# Altium PCB New_LXe_twr.PcbDoc (part 1 of 5)
Units mm, origin at the board's own origin, x right, y up, seen from the top; angles counter-clockwise.
Board outline 130 x 150 mm, 6 copper layers (Top Layer, Internal Plane 1, MidLayer1, MidLayer2, Internal Plane 2, Bottom Layer); 673 components, 504 nets, 5569 pads, 803 vias.
Unrouted connection lines stored in the file: 633.
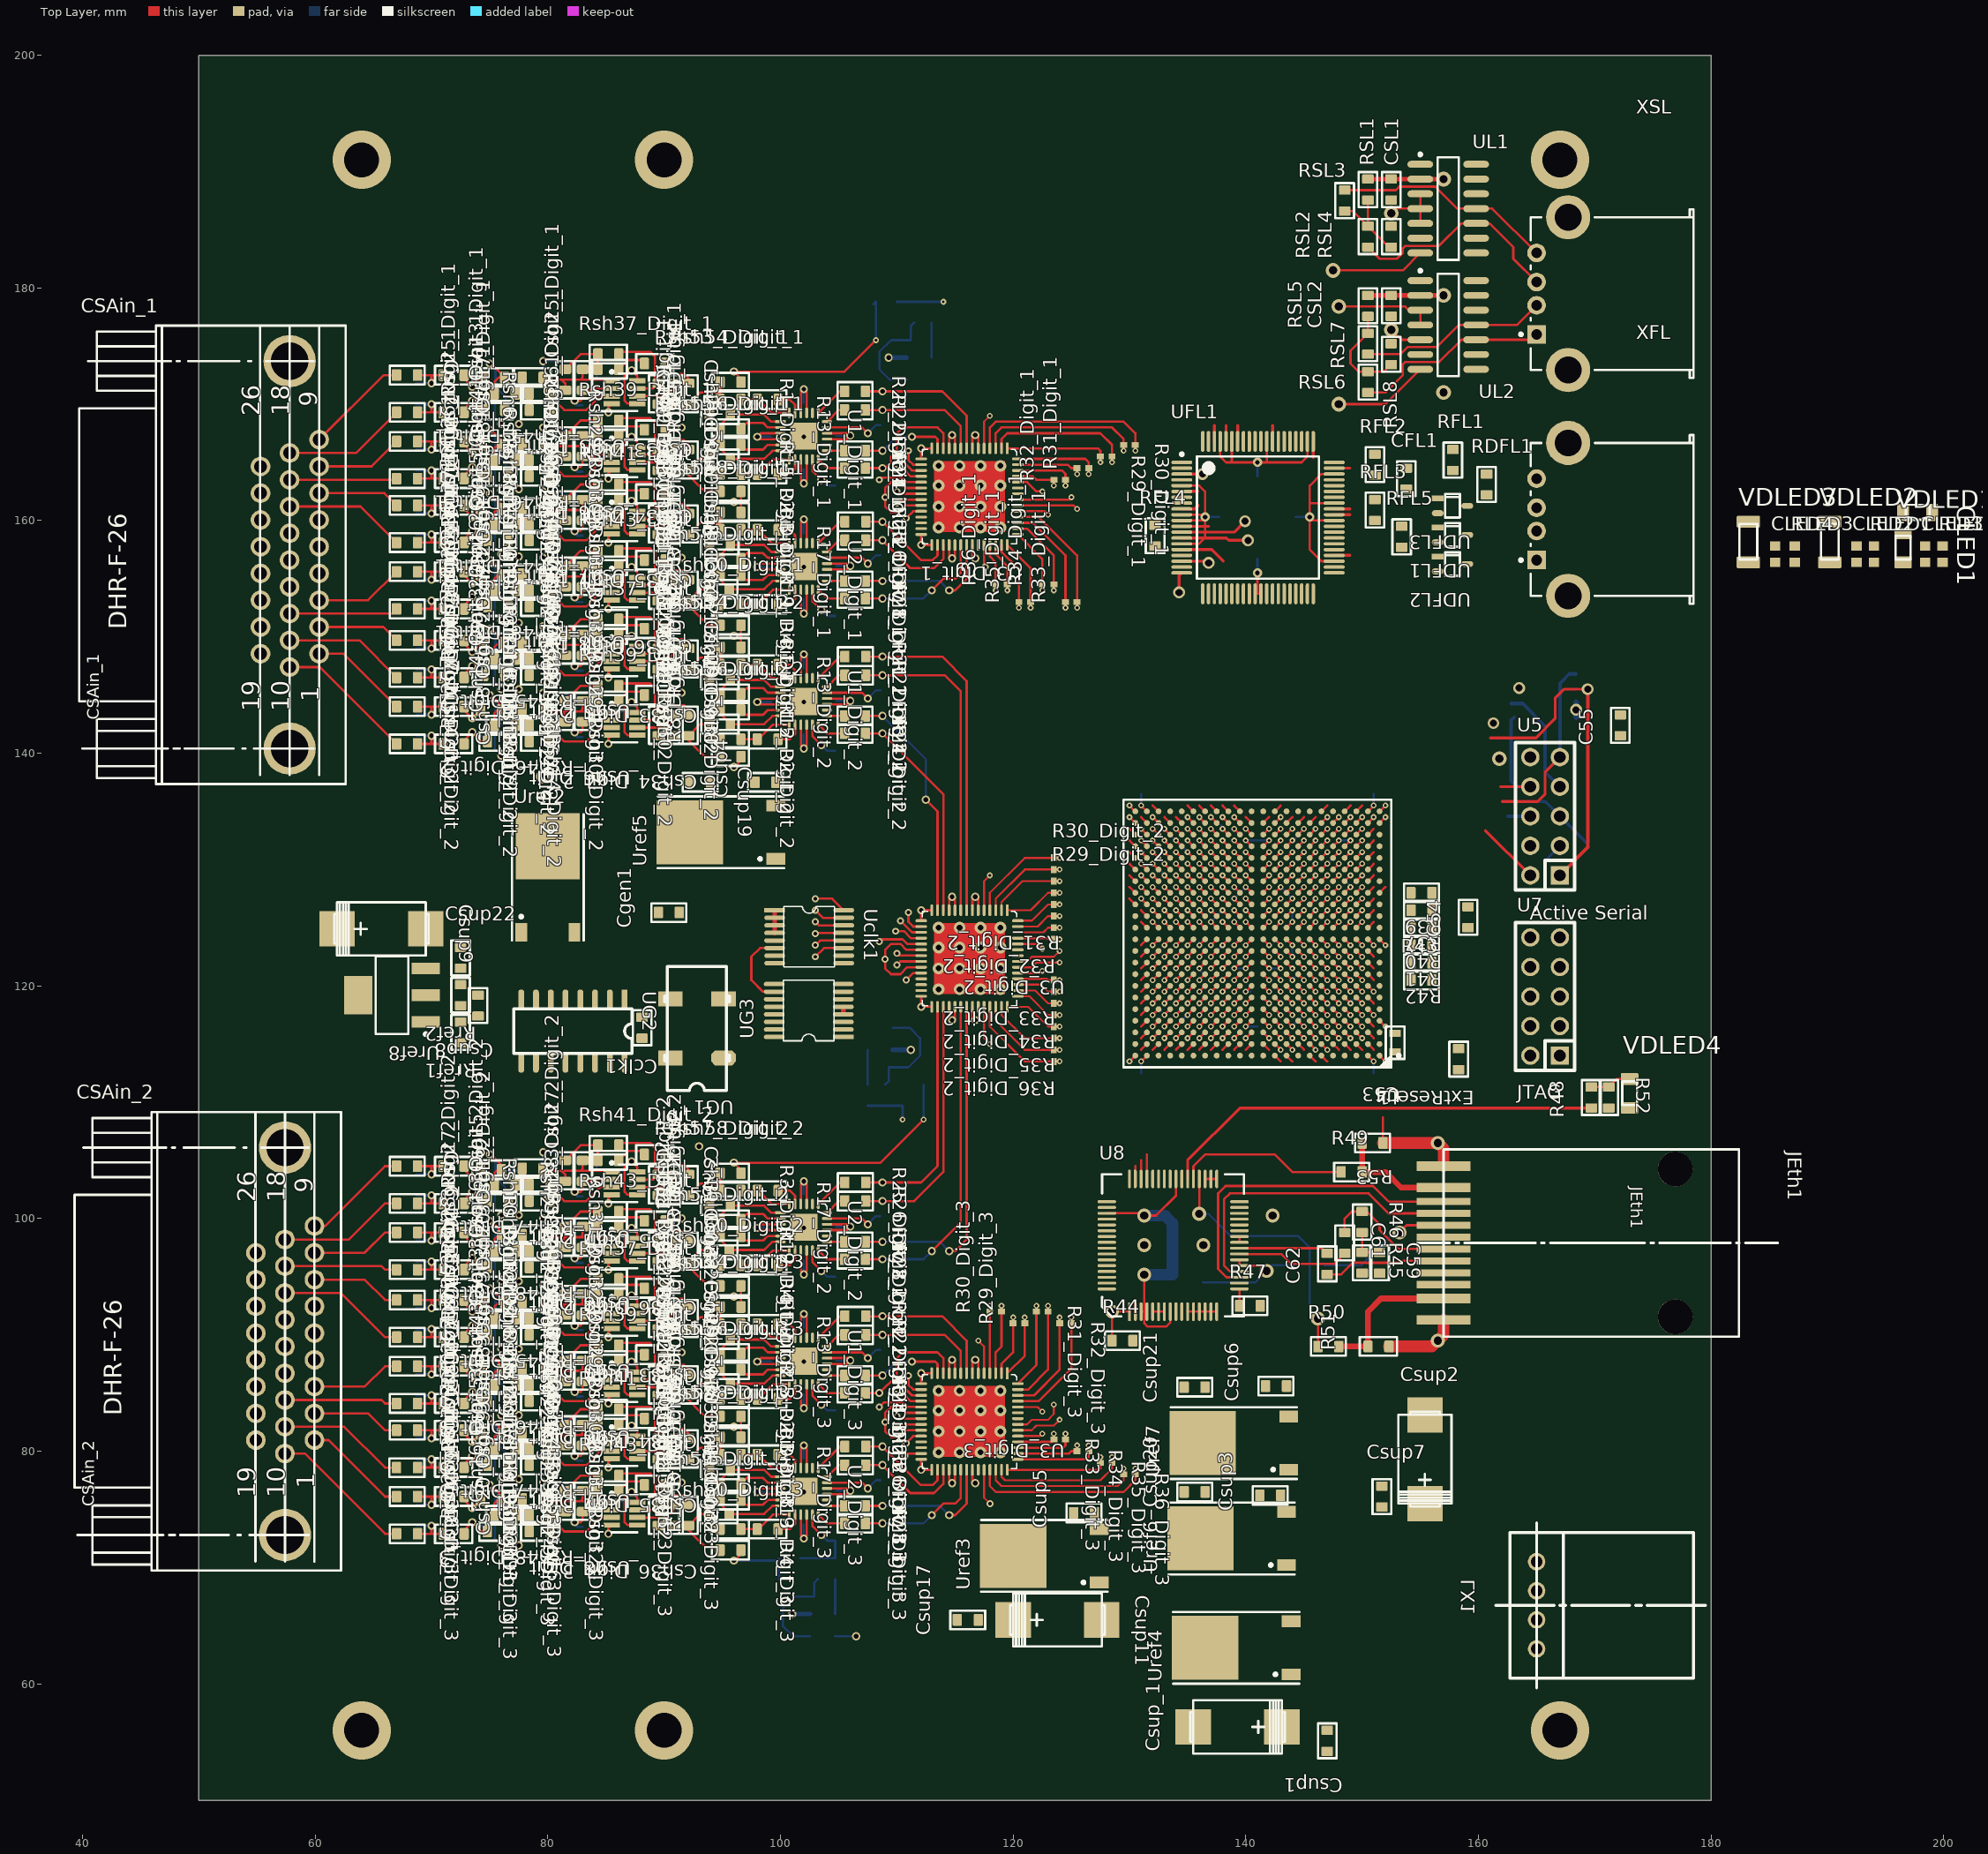
[diagram p0: Top Layer view]
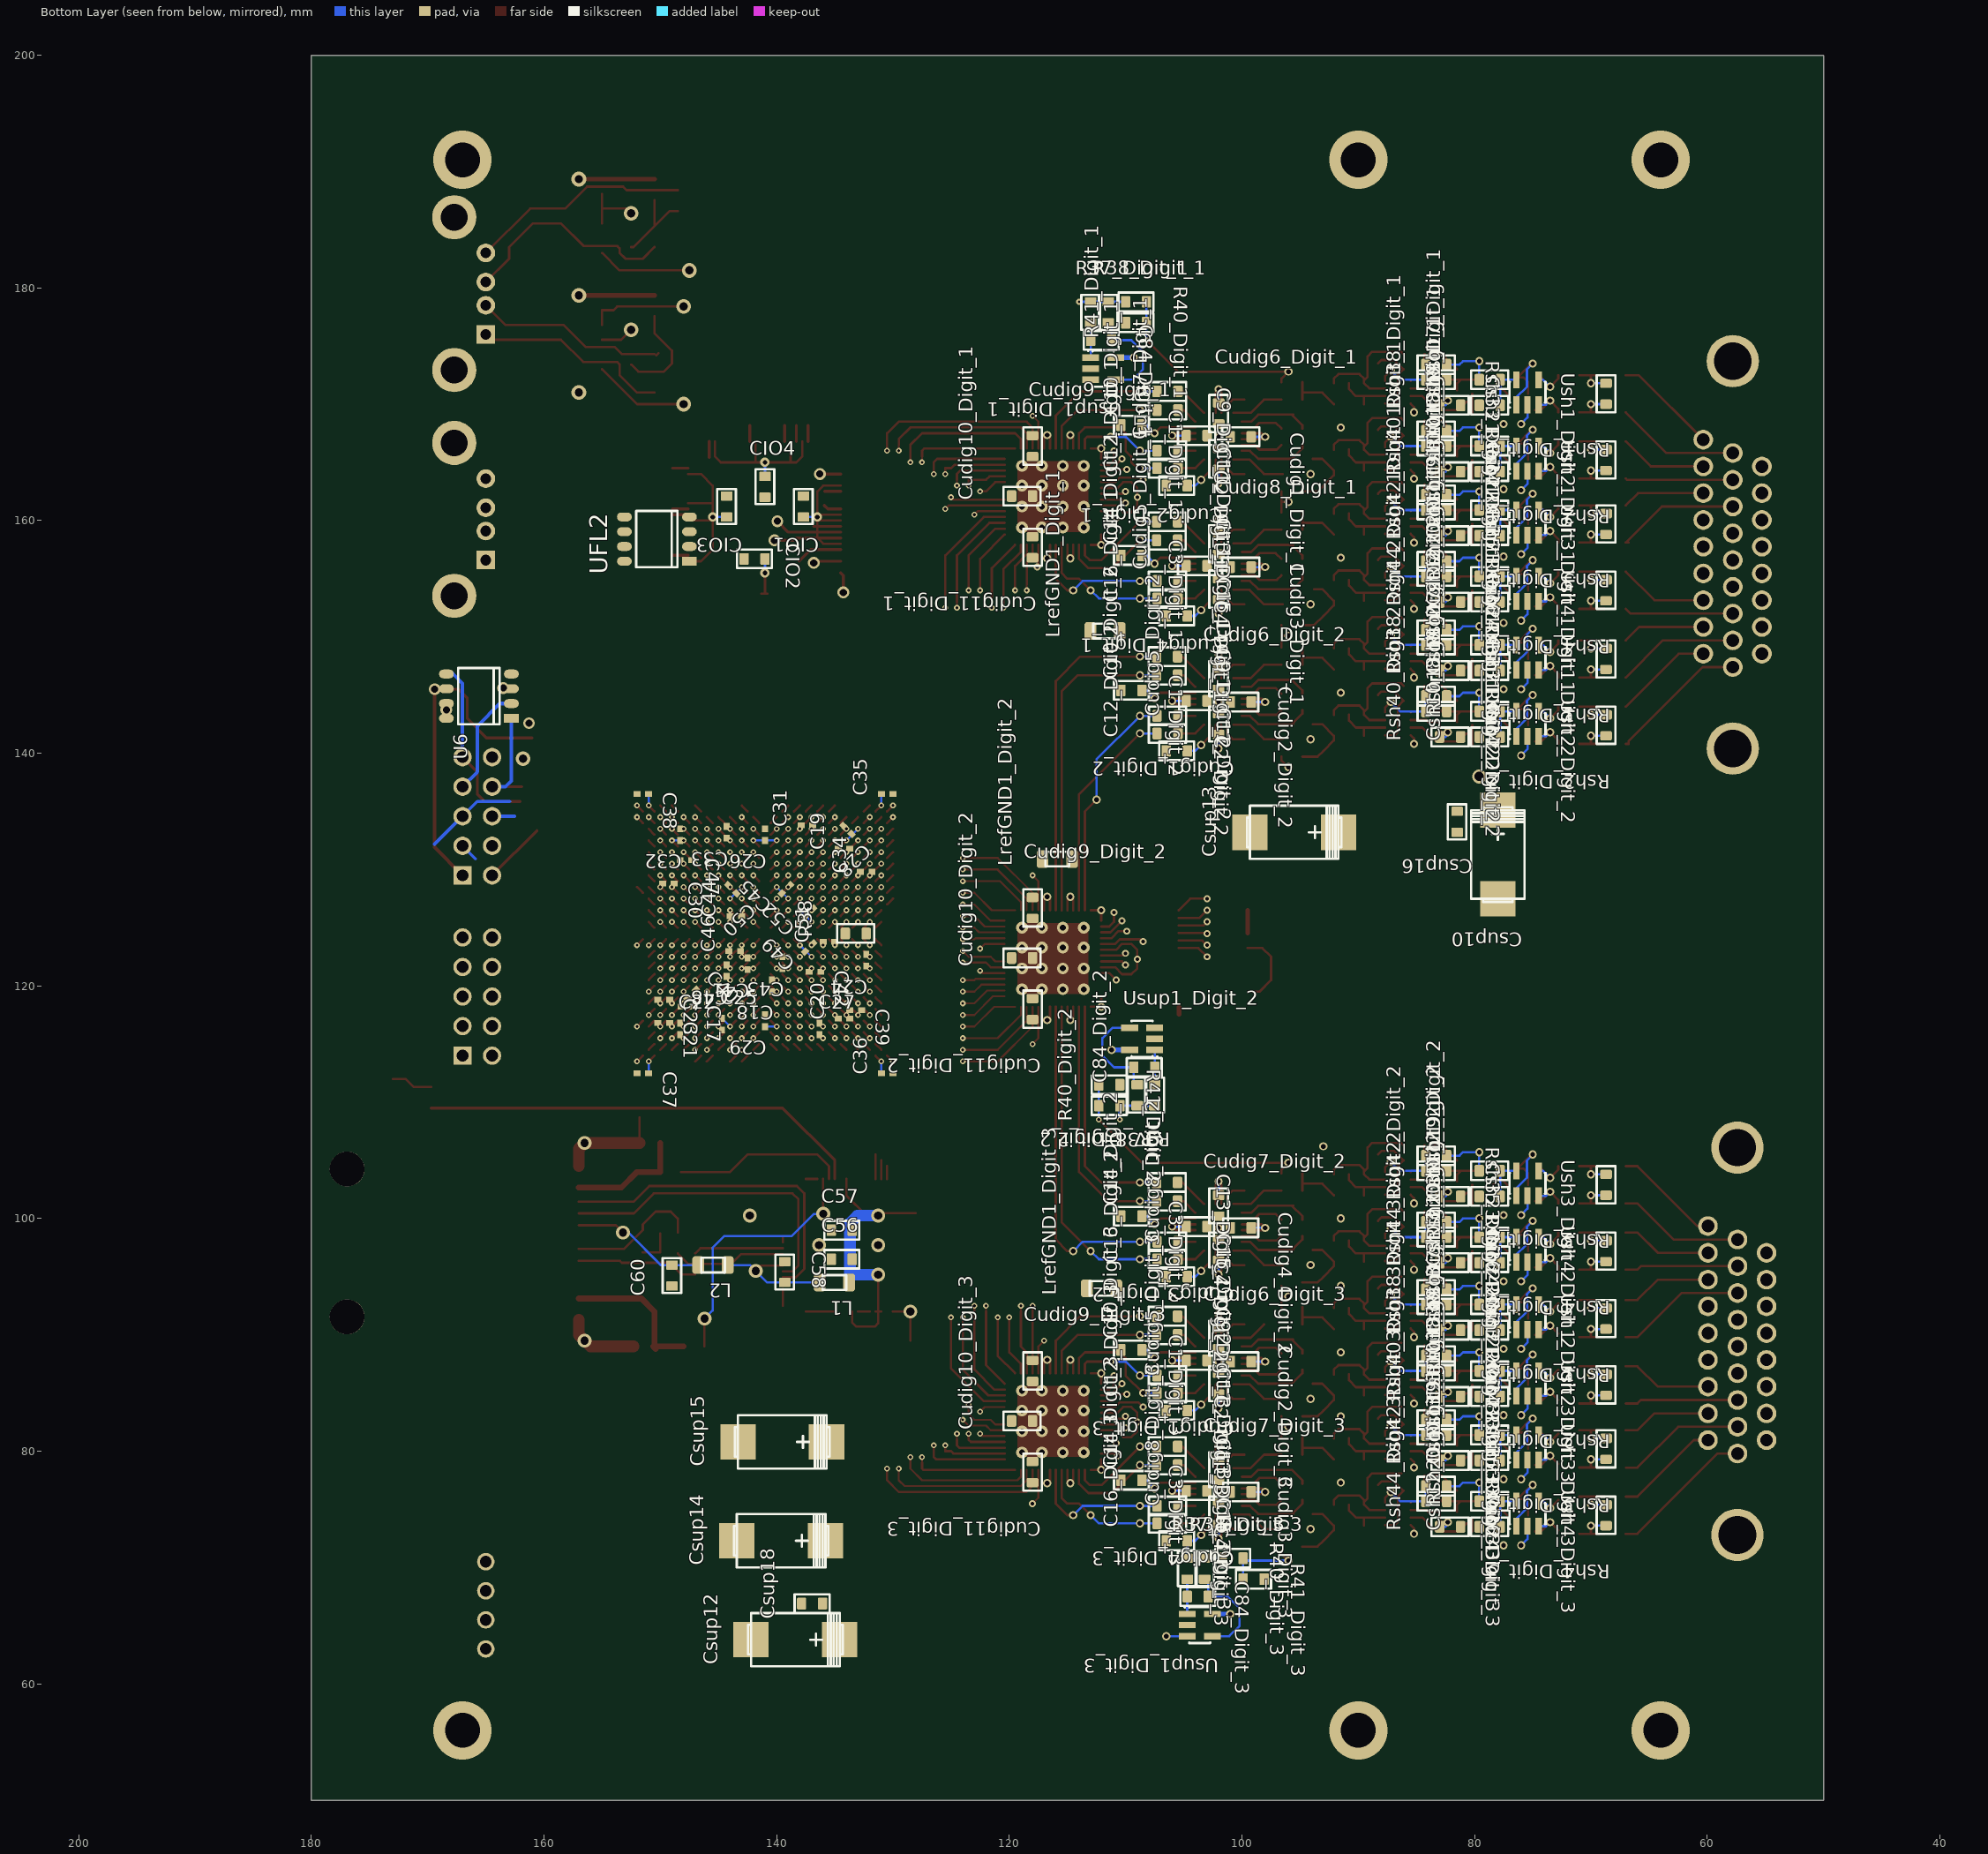
[diagram p1: Bottom Layer view, seen from below]
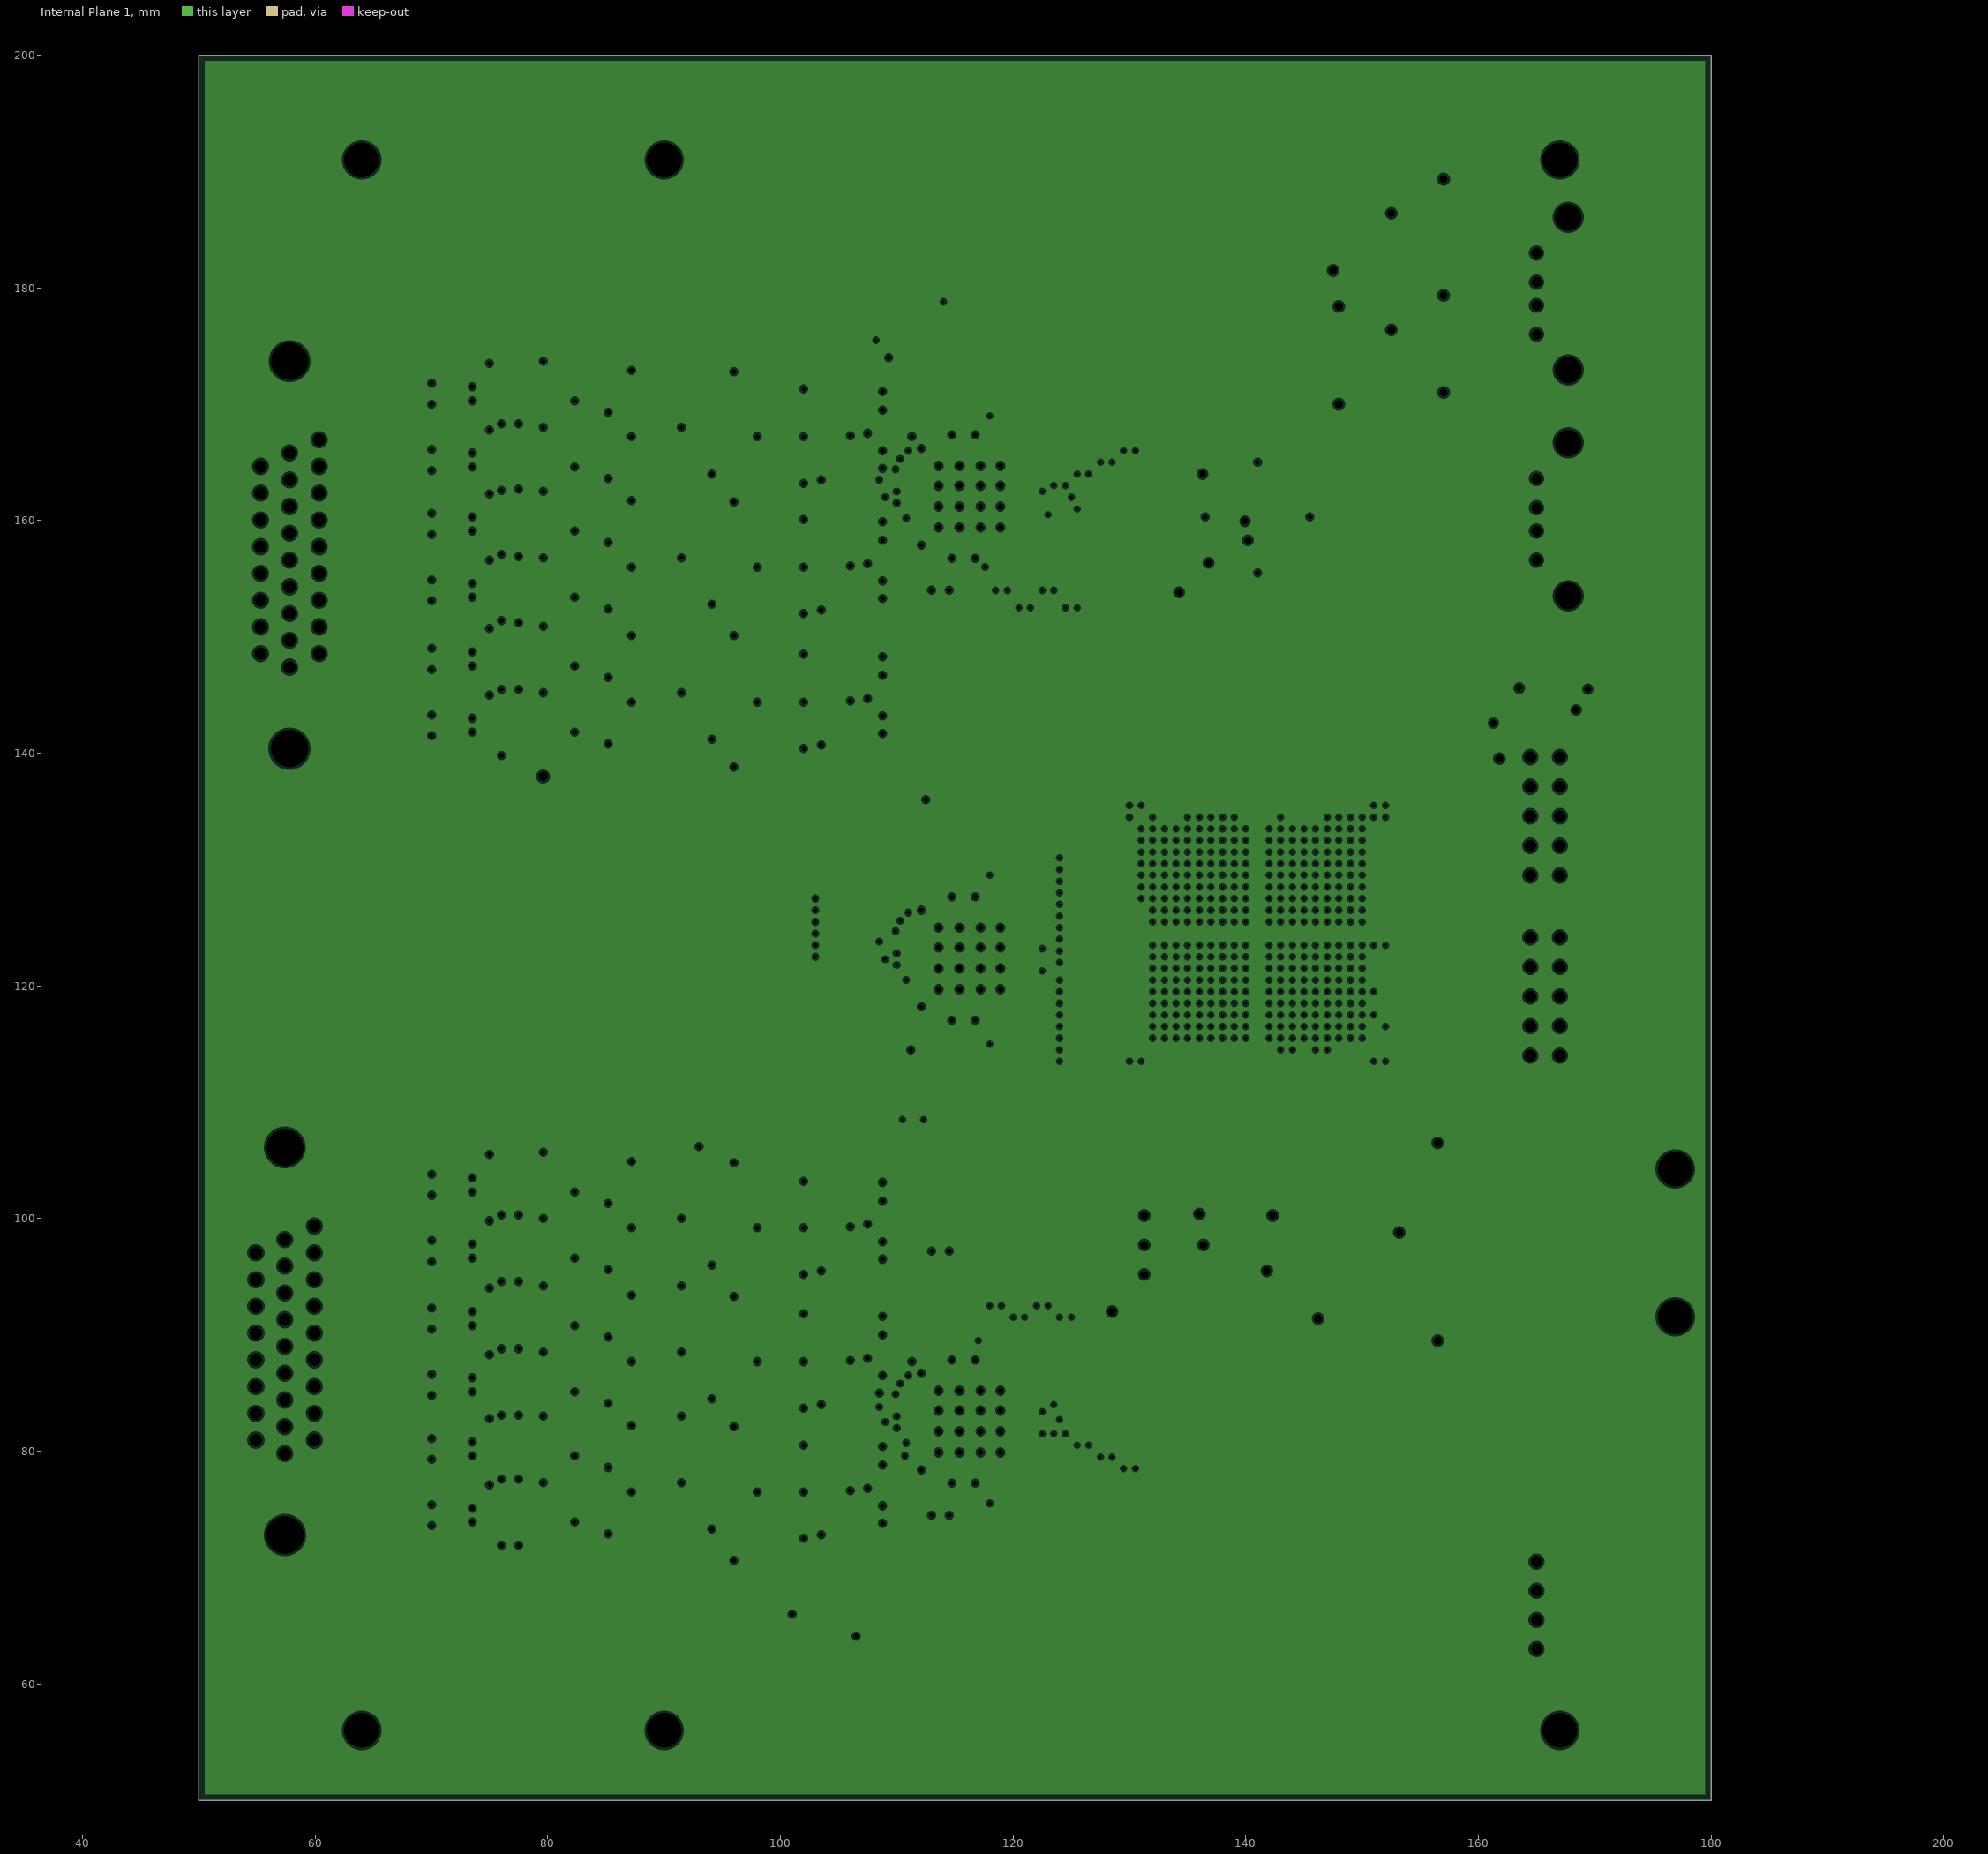
[diagram p2: Internal Plane 1, clearances drawn from the general rule]
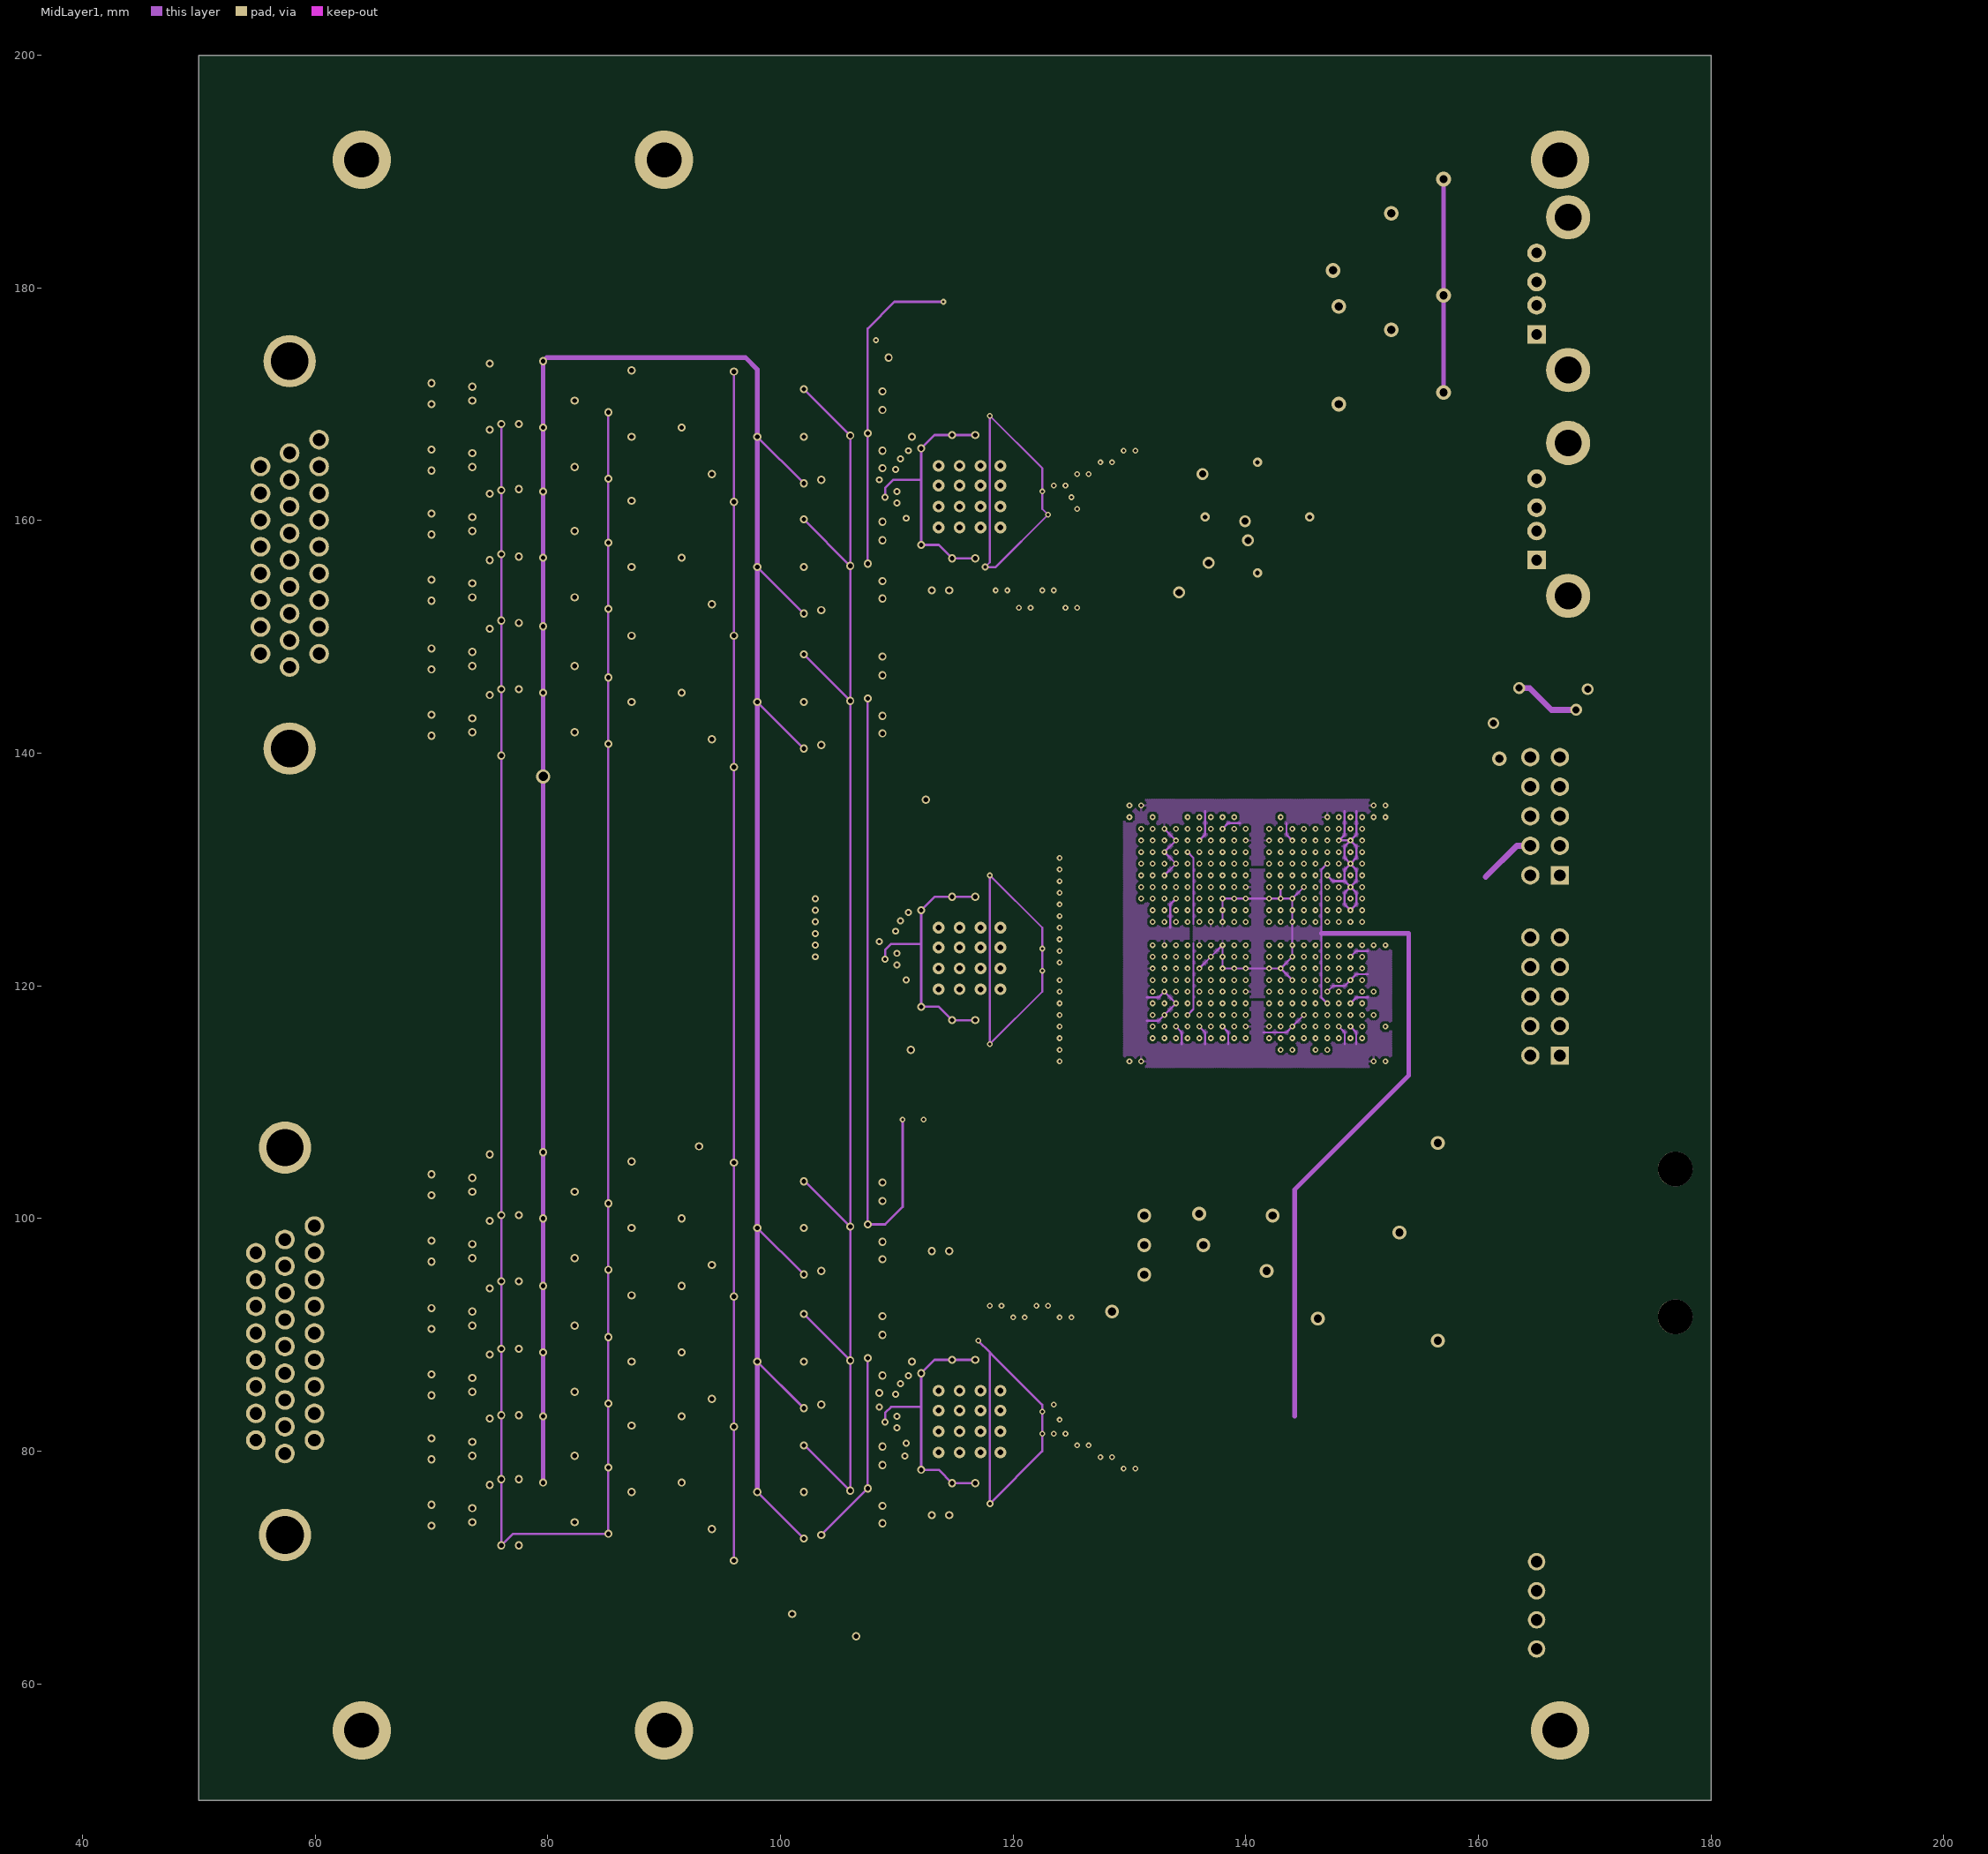
[diagram p3: MidLayer1]
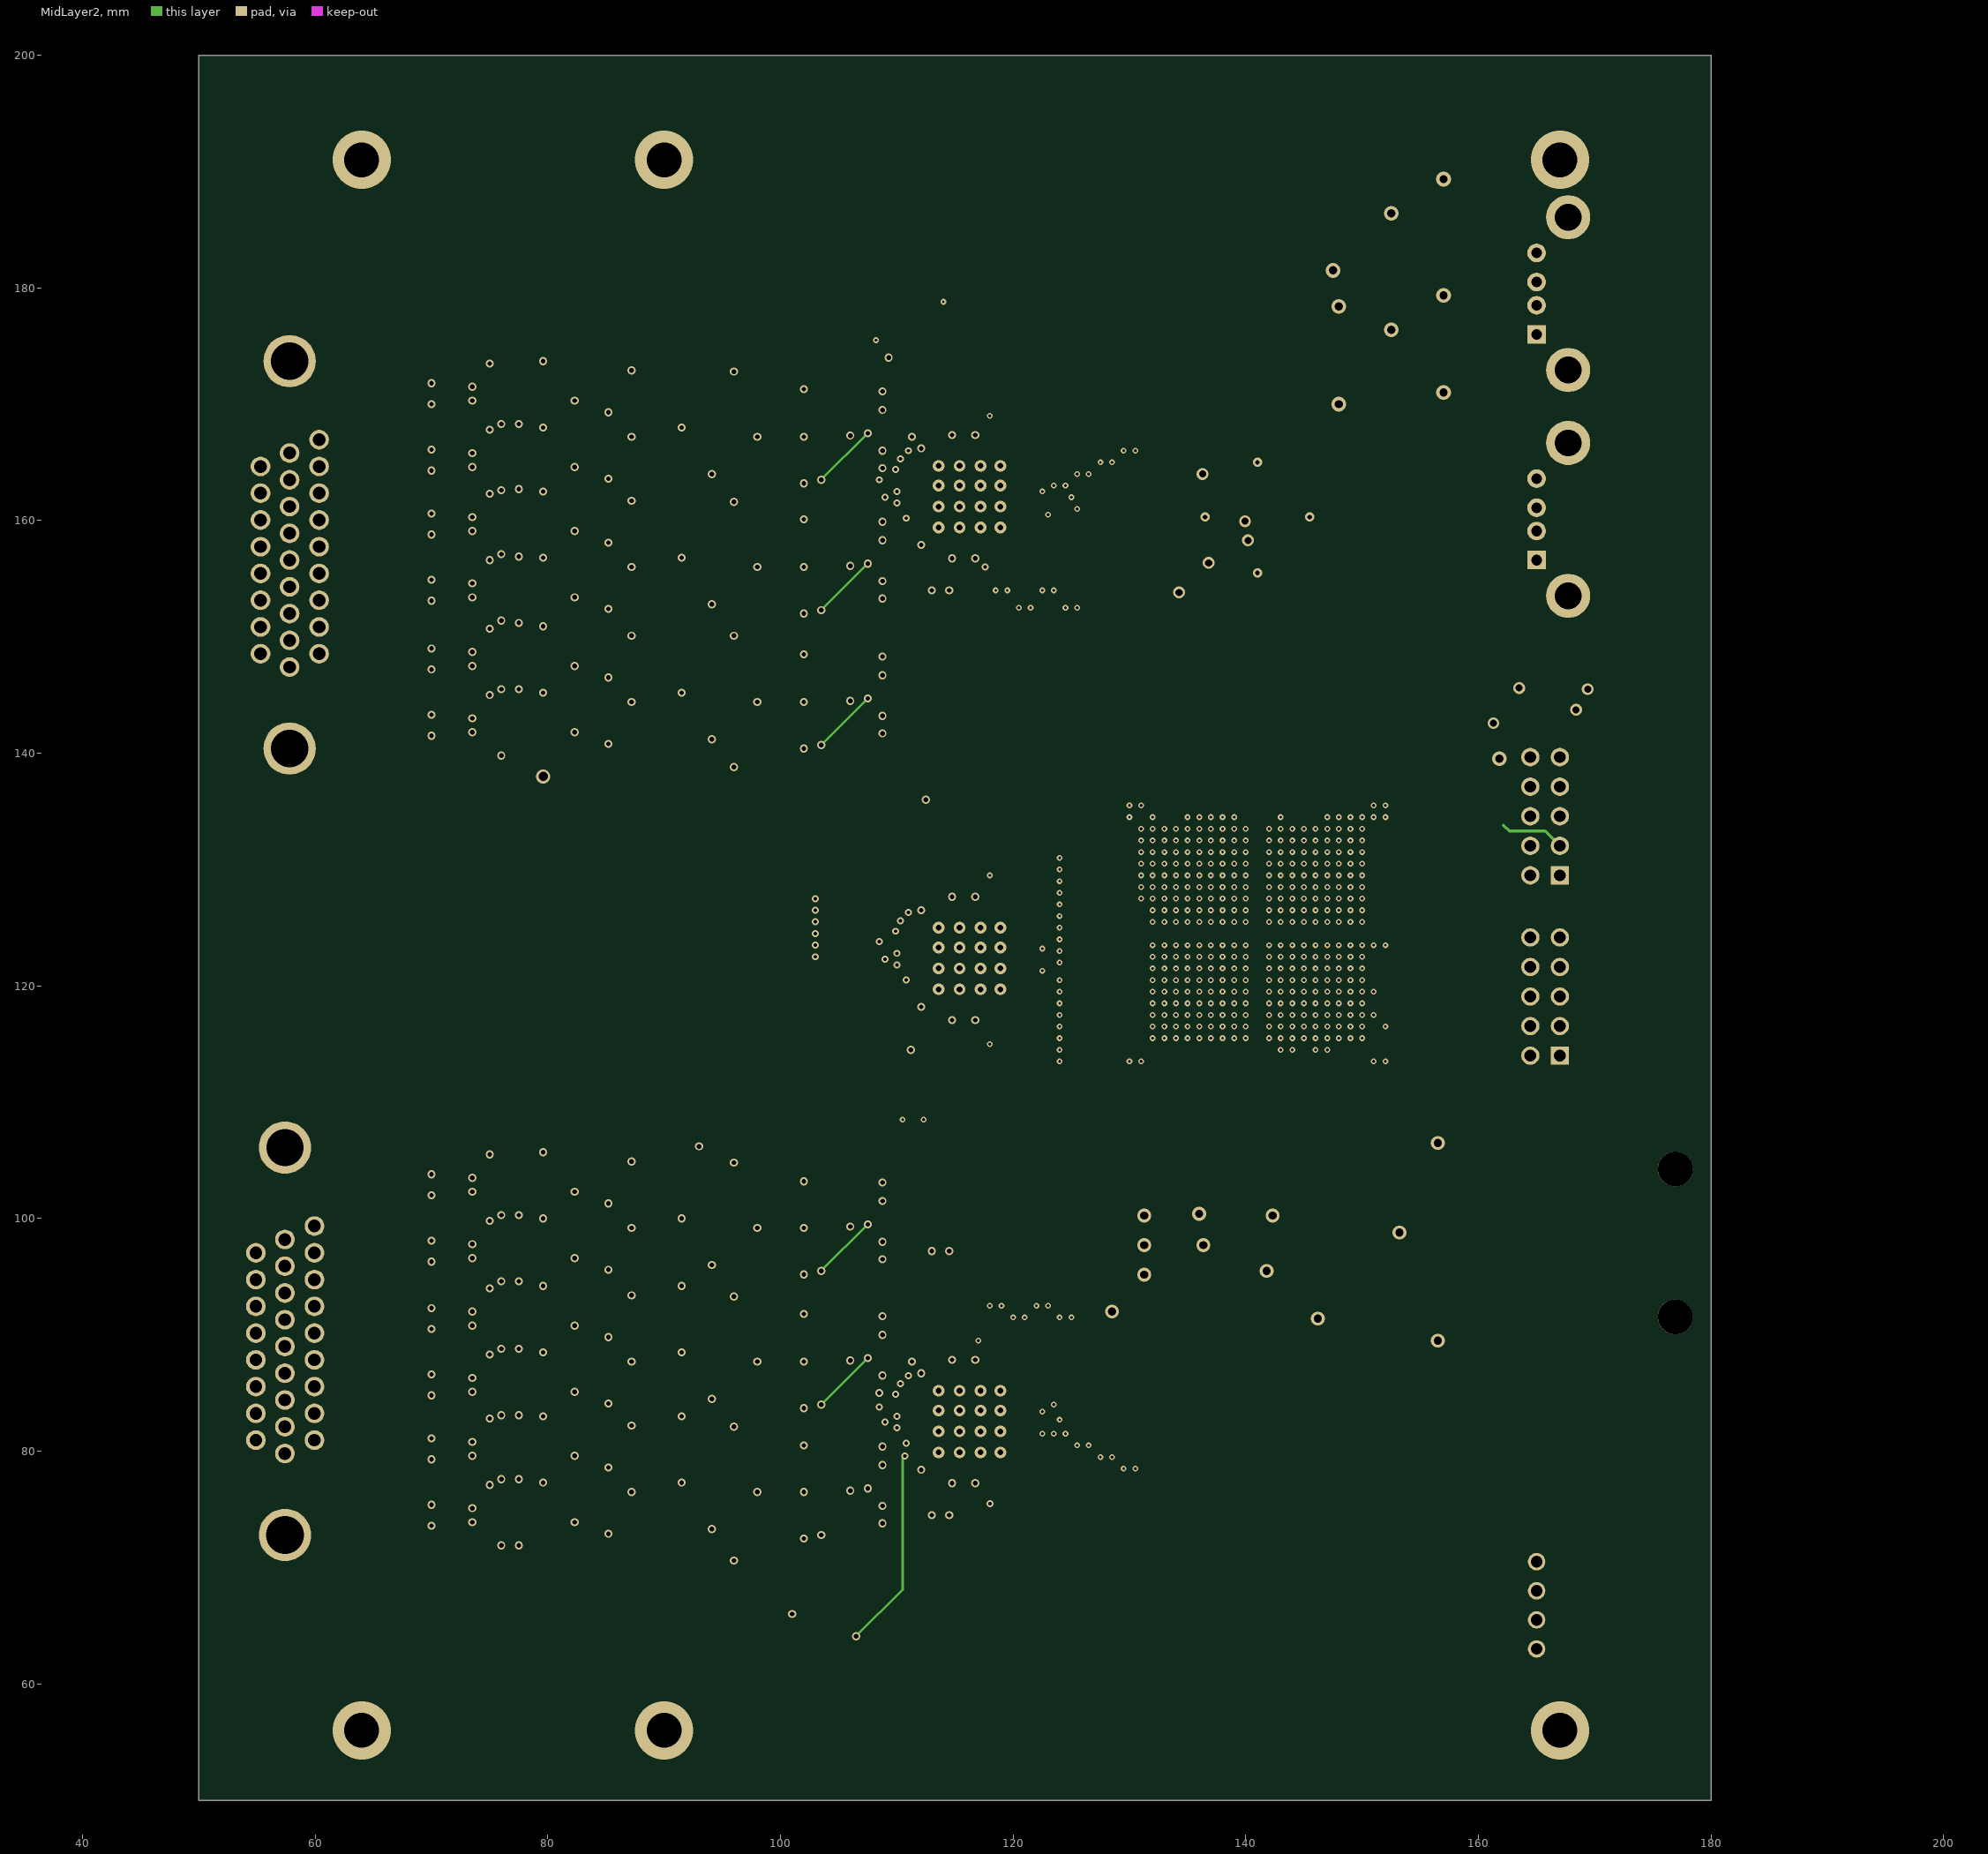
[diagram p4: MidLayer2]
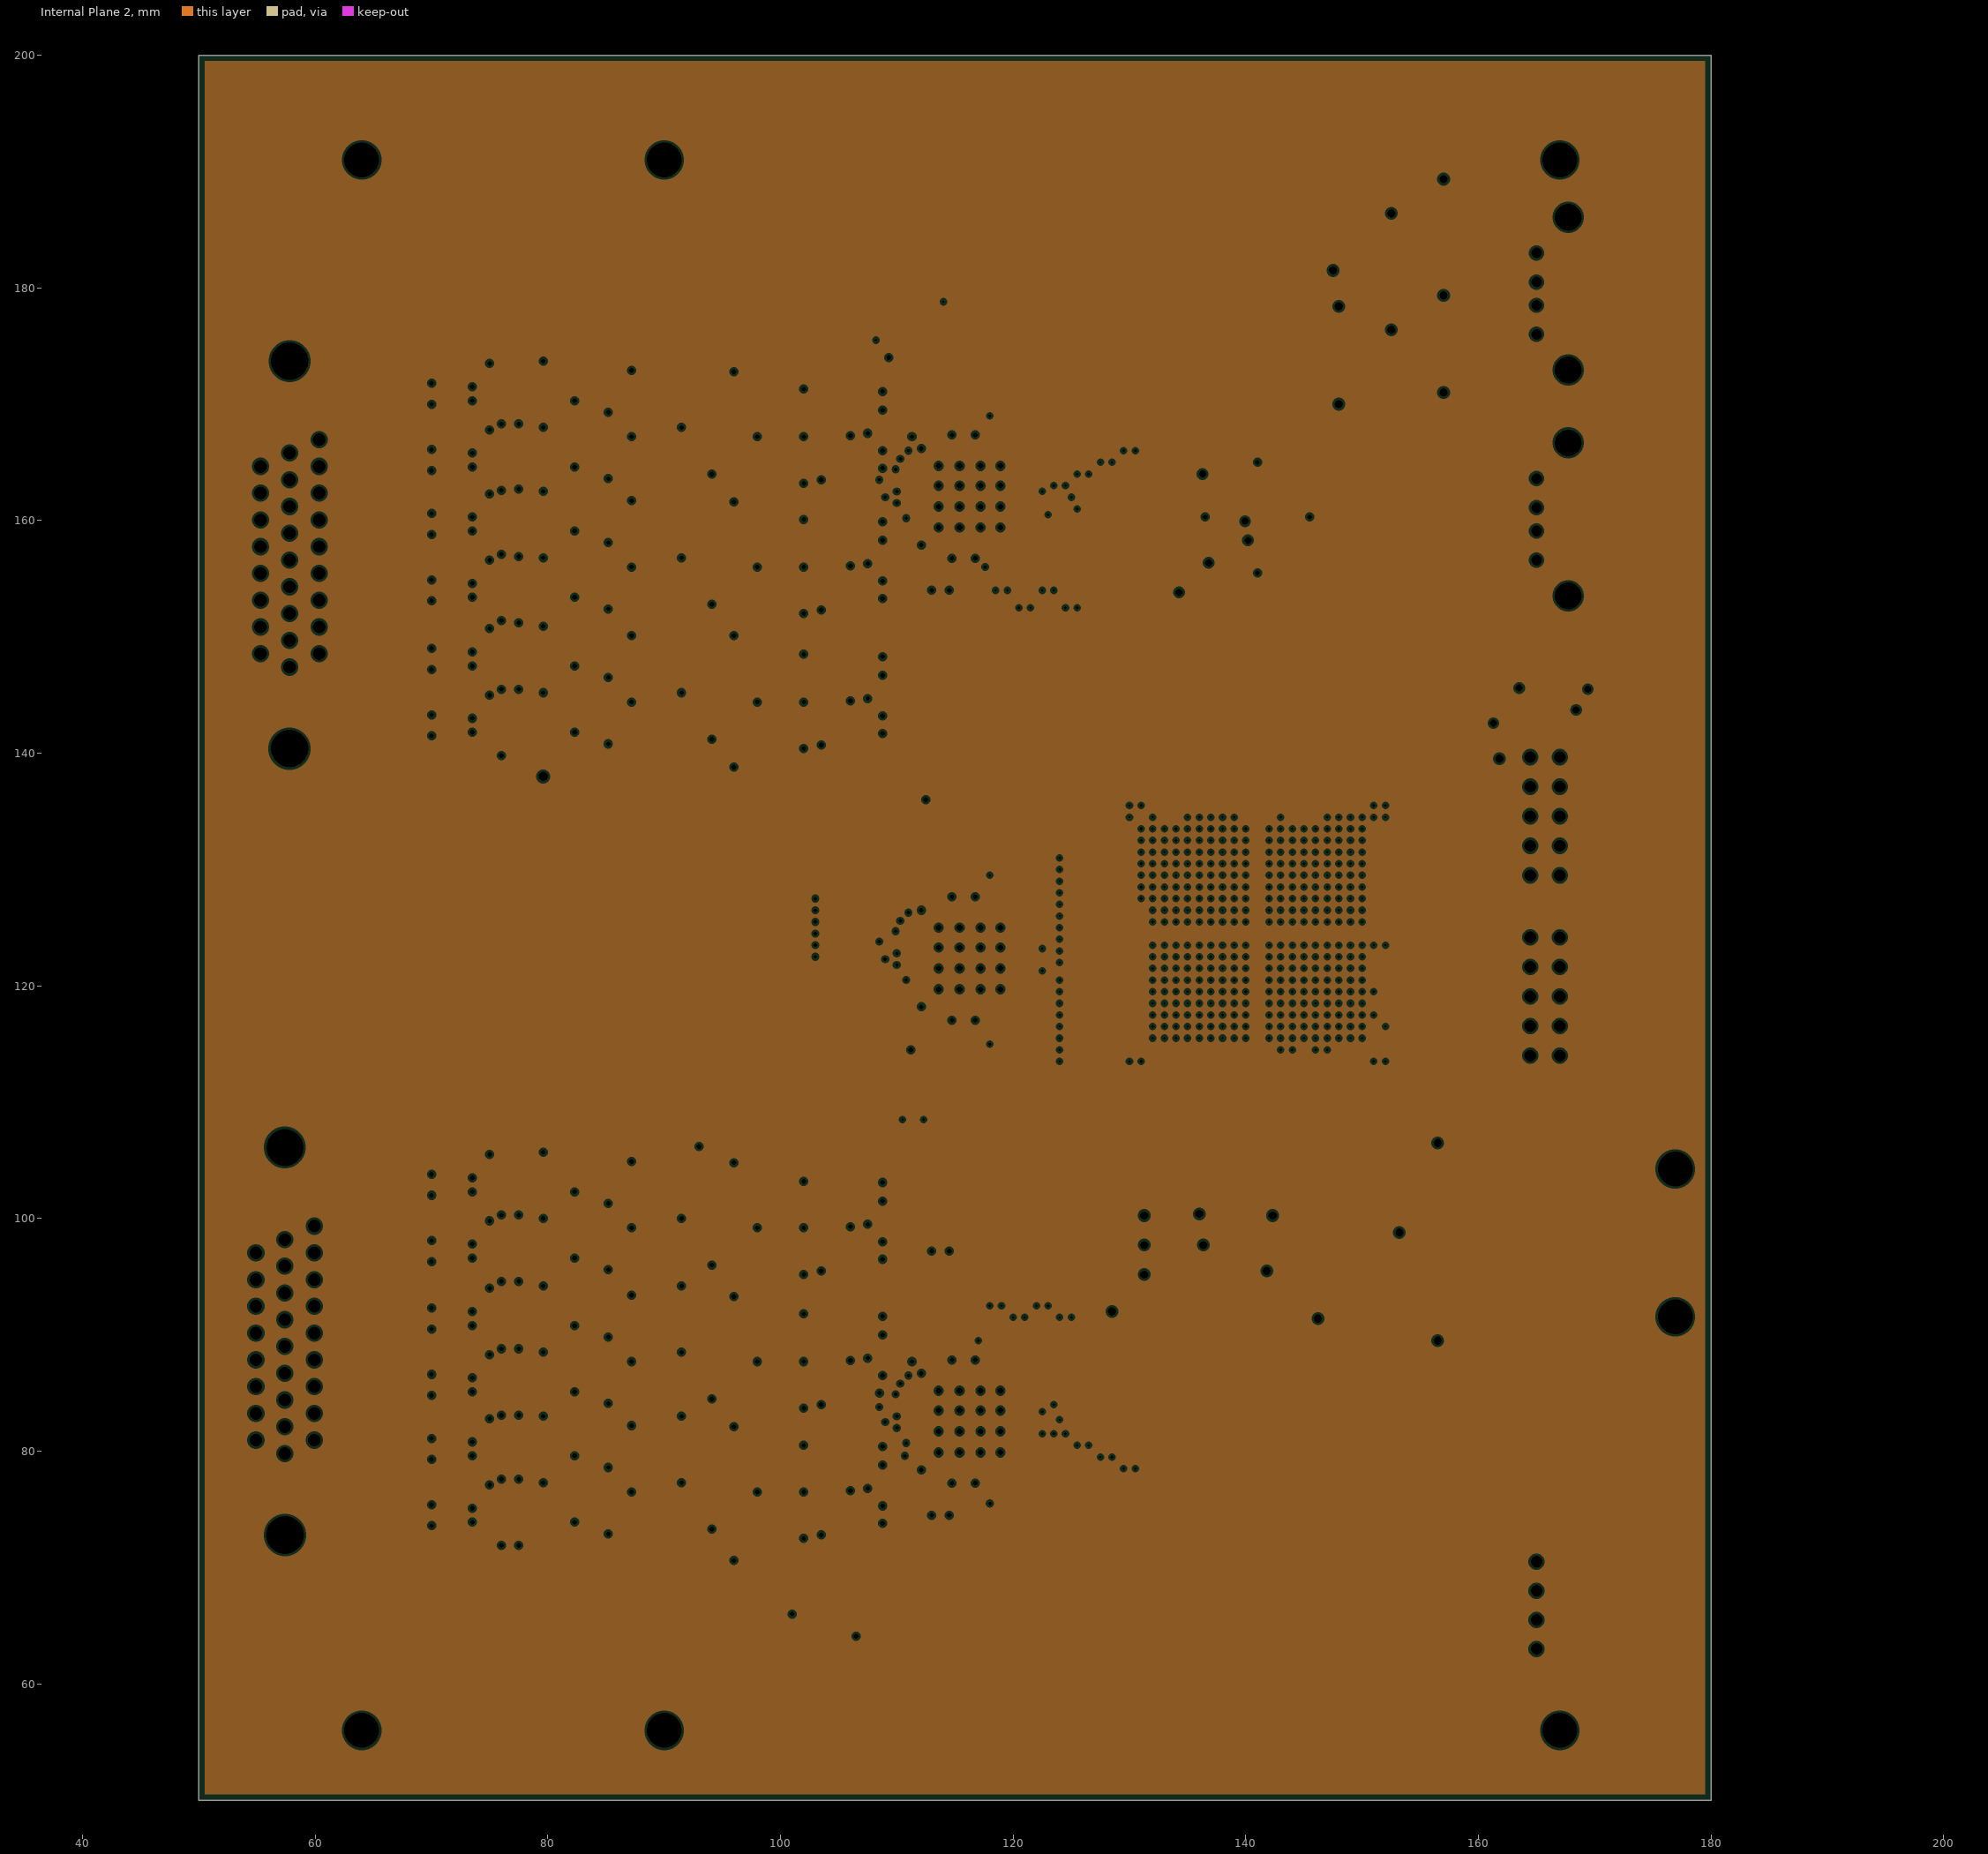
[diagram p5: Internal Plane 2, clearances drawn from the general rule]

## Layer stack, top to bottom
Top Layer: signal copper 0.0356
Dielectric: core 0.32, FR-4, Dk 4.8
Internal Plane 1: plane copper 0.0356
Dielectric: prepreg 0.32, FR-4, Dk 4.8
MidLayer1: signal copper 0.0356
Dielectric: core 0.32, FR-4, Dk 4.8
MidLayer2: signal copper 0.0356
Dielectric: prepreg 0.32, FR-4, Dk 4.8
Internal Plane 2: plane copper 0.0356
Dielectric: core 0.32, FR-4, Dk 4.8
Bottom Layer: signal copper 0.0356

## Board outline
50,50 50,200 180,200 180,50

## Design rules (kind name [scope] priority, off if disabled: settings)
Clearance Fill [(InPolygon)] p1: gap=0.2
Clearance [All] p2: gap=0.2
DiffPairsRouting [All] p1: maxlimit=0.254 minlimit=0.254 mostfreqgap=0.254 maxuncoupledlength=12.7
FabricationTestPointUsage TestPointUsage [All] p1: valid=0 allowmultiple=FALSE
FabricationTestpoint Testpoint [All] p1: side=3 testpointundercomponent=TRUE minsize=1.016 maxsize=2.54 preferedsize=1.524 minholesize=0 maxholesize=1.016 preferedholesize=0.813 testpointgrid=0.025 allowsidetop=TRUE allowsidebottom=TRUE usegrid=TRUE gridtolerance=0
FanoutControl Fanout_Small [All] p1 off: bgadir=Out bgaviamode=Centered fanoutstyle=Auto fanoutdirection=Alternating viagrid=0.025 // Protel DXP Scope 1 Expression Was: (CompPinCount < 5)   Fanout_Small (Default Rule)
FanoutControl Fanout_Default [All] p2: bgadir=Out bgaviamode=Centered fanoutstyle=Auto fanoutdirection=Alternating viagrid=0.025 // Fanout_Default (Default Rule)
FanoutControl Fanout_SOIC [All] p3 off: bgadir=Out bgaviamode=Centered fanoutstyle=Auto fanoutdirection=Alternating viagrid=0.025 // Protel DXP Scope 1 Expression Was: IsSOIC   Fanout_SOIC (Default Rule)
FanoutControl Fanout_BGA [All] p4 off: bgadir=Out bgaviamode=Centered fanoutstyle=Auto fanoutdirection=Alternating viagrid=0.025 // Protel DXP Scope 1 Expression Was: IsBGA   Fanout_BGA (Default Rule)
FanoutControl Fanout_LCC [All] p5 off: bgadir=Out bgaviamode=Centered fanoutstyle=Auto fanoutdirection=Alternating viagrid=0.025 // Protel DXP Scope 1 Expression Was: IsLCC   Fanout_LCC (Default Rule)
PlaneClearance [All] p1: clearance=0.2
PlaneConnect [All] p1: planeconnectstyle=Relief reliefexpansion=0.3 reliefentries=4 reliefconductorwidth=0.175 reliefairgap=0.3
PolygonConnect [All] p1: connectstyle=Relief reliefconductorwidth=0.175 reliefentries=4 polygonreliefangle="90 Angle"
RoomDefinition Digit_2 [InComponentClass('Digit_2')] p1: confinementstyle=ConfineIn formatcopy=TRUE lockcomponents=FALSE outline 236.4,93.6 293.9,93.6 293.9,146.1 236.4,146.1
RoomDefinition "U_Ref&Supply unit" [InComponentClass('U_Ref&Supply unit')] p2: confinementstyle=ConfineIn formatcopy=TRUE lockcomponents=FALSE outline 179.3,60.3 223,60.3 223,80.9 179.3,80.9
RoomDefinition Timing [InComponentClass('Timing')] p3: confinementstyle=ConfineIn formatcopy=TRUE lockcomponents=FALSE outline 157,152.3 125.4,152.3 125.4,138.6 157,138.6
RoomDefinition "Main schem" [InComponentClass('Main schem')] p4: confinementstyle=ConfineIn formatcopy=TRUE lockcomponents=FALSE outline 181.1,122.9 219,122.9 219,152.1 181.1,152.1
RoomDefinition Ethernet [InComponentClass('Ethernet')] p5: confinementstyle=ConfineIn formatcopy=TRUE lockcomponents=FALSE outline 123.5,85.77 174.1,85.77 174.1,109 123.5,109
RoomDefinition Digit_3 [InComponentClass('Digit_3')] p6: confinementstyle=ConfineIn formatcopy=TRUE lockcomponents=FALSE outline 236.4,66.6 293.9,66.6 293.9,93.6 236.4,93.6
RoomDefinition Digit_1 [InComponentClass('Digit_1')] p7: confinementstyle=ConfineIn formatcopy=TRUE lockcomponents=FALSE outline 236.4,147.1 293.9,147.1 293.9,173.1 236.4,173.1
RoomDefinition FPGA [InComponentClass('FPGA')] p8: confinementstyle=ConfineIn formatcopy=TRUE lockcomponents=FALSE outline 128.5,110 174,110 174,137.5 128.5,137.5
RoomDefinition In-Out [InComponentClass('In-Out')] p9: confinementstyle=ConfineIn formatcopy=TRUE lockcomponents=FALSE outline 132.865,155.6 174,155.6 174,184.8 132.865,184.8
RoutingCorners [All] p1: cornerstyle=45-Degree minsetback=2 maxsetback=2
RoutingVias [All] p1: holewidth=0.7 width=1 viastyle="Through Hole" minholewidth=0.25 minwidth=0.5 maxholewidth=2.5 maxwidth=4.5
SilkscreenOverComponentPads [All] p1: minsilkscreentomaskgap=0.254
SolderMaskExpansion [All] p1: expansion=0.1
Width [All] p1: maxlimit=1 minlimit=0.15 preferedwidth=0.2 midlayer1_minwidth=0.175 midlayer2_minwidth=0.175 minimp=50.000000 maximp=50.000000 favimp=50.000000
16 further rules are at their usual default settings.

## Classes and differential pairs
component class In-Out: CFL1 CIO1 CIO2 CIO3 CIO4 CSAin_1 CSAin_2 CSL1 CSL2 RDFL1 RFL1 RFL2 RFL3 RFL4 RFL5 RSL1 RSL2 RSL3 RSL4 RSL5 RSL6 RSL7 RSL8 UDFL1 UDFL2 UDFL3 UFL1 UFL2 UL1 UL2 VDL1 XFL XSL
component class Ethernet: C56 C57 C58 C59 C60 C61 C62 JEth1 L1 L2 R44 R45 R46 R47 R48 R49 R50 R51 R52 R53 U8 VDLED4
component class Digit_3: C1_Digit_3 C2_Digit_3 C3_Digit_3 C4_Digit_3 C9_Digit_3 C10_Digit_3 C11_Digit_3 C12_Digit_3 C13_Digit_3 C14_Digit_3 C15_Digit_3 C16_Digit_3 C84_Digit_3 Csh1_Digit_3 Csh2_Digit_3 Csh3_Digit_3 Csh4_Digit_3 Csh5_Digit_3 Csh6_Digit_3 Csh7_Digit_3 Csh8_Digit_3 Csh9_Digit_3 Csh10_Digit_3 Csh11_Digit_3 Csh12_Digit_3 Csh13_Digit_3 Csh14_Digit_3 Csh15_Digit_3 Csh16_Digit_3 Csh17_Digit_3 Csh18_Digit_3 Csh19_Digit_3 Csh20_Digit_3 Csh21_Digit_3 Csh22_Digit_3 Csh23_Digit_3 Csh24_Digit_3 Csh25_Digit_3 Csh26_Digit_3 Csh27_Digit_3 Csh28_Digit_3 Csh29_Digit_3 Csh30_Digit_3 Csh31_Digit_3 Csh32_Digit_3 Csh33_Digit_3 Csh34_Digit_3 Csh35_Digit_3 Csh36_Digit_3 Cudig1_Digit_3 Cudig2_Digit_3 Cudig3_Digit_3 Cudig4_Digit_3 Cudig5_Digit_3 Cudig6_Digit_3 Cudig7_Digit_3 Cudig8_Digit_3 Cudig9_Digit_3 Cudig10_Digit_3 Cudig11_Digit_3 LrefGND1_Digit_3 R1_Digit_3 R2_Digit_3 R3_Digit_3 R4_Digit_3 R5_Digit_3 R6_Digit_3 R7_Digit_3 R8_Digit_3 R9_Digit_3 R10_Digit_3 R11_Digit_3 R12_Digit_3 R13_Digit_3 R14_Digit_3 R15_Digit_3 R16_Digit_3 R17_Digit_3 R18_Digit_3 R19_Digit_3 R20_Digit_3 R21_Digit_3 R22_Digit_3 R23_Digit_3 R24_Digit_3 R25_Digit_3 R26_Digit_3 R27_Digit_3 R28_Digit_3 R29_Digit_3 R30_Digit_3 R31_Digit_3 R32_Digit_3 R33_Digit_3 R34_Digit_3 R35_Digit_3 R36_Digit_3 R37_Digit_3 R38_Digit_3 R40_Digit_3 R41_Digit_3 Rsh1_Digit_3 Rsh2_Digit_3 Rsh3_Digit_3 Rsh4_Digit_3 Rsh5_Digit_3 Rsh6_Digit_3 Rsh7_Digit_3 Rsh8_Digit_3 Rsh9_Digit_3 Rsh10_Digit_3 Rsh11_Digit_3 Rsh12_Digit_3 Rsh13_Digit_3 Rsh14_Digit_3 Rsh15_Digit_3 Rsh16_Digit_3 Rsh17_Digit_3 Rsh18_Digit_3 Rsh19_Digit_3 Rsh20_Digit_3 Rsh21_Digit_3 Rsh22_Digit_3 Rsh23_Digit_3 Rsh24_Digit_3 Rsh25_Digit_3 Rsh26_Digit_3 Rsh27_Digit_3 Rsh28_Digit_3 Rsh29_Digit_3 Rsh30_Digit_3 Rsh31_Digit_3 Rsh32_Digit_3 Rsh33_Digit_3 Rsh34_Digit_3 Rsh35_Digit_3 Rsh36_Digit_3 Rsh37_Digit_3 Rsh38_Digit_3 Rsh39_Digit_3 Rsh40_Digit_3 Rsh41_Digit_3 Rsh42_Digit_3 Rsh43_Digit_3 Rsh44_Digit_3 Rsh45_Digit_3 Rsh46_Digit_3 Rsh47_Digit_3 Rsh48_Digit_3 Rsh49_Digit_3 Rsh50_Digit_3 Rsh51_Digit_3 Rsh52_Digit_3 Rsh53_Digit_3 Rsh54_Digit_3 Rsh55_Digit_3 Rsh56_Digit_3 Rsh57_Digit_3 Rsh58_Digit_3 Rsh59_Digit_3 Rsh60_Digit_3 U1_Digit_3 U2_Digit_3 U3_Digit_3 Ush1_Digit_3 Ush2_Digit_3 Ush3_Digit_3 Ush4_Digit_3 Ush5_Digit_3 Ush6_Digit_3 Ush7_Digit_3 Ush8_Digit_3 Usup1_Digit_3
component class Digit_2: C1_Digit_2 C2_Digit_2 C3_Digit_2 C4_Digit_2 C9_Digit_2 C10_Digit_2 C11_Digit_2 C12_Digit_2 C13_Digit_2 C14_Digit_2 C15_Digit_2 C16_Digit_2 C84_Digit_2 Csh1_Digit_2 Csh2_Digit_2 Csh3_Digit_2 Csh4_Digit_2 Csh5_Digit_2 Csh6_Digit_2 Csh7_Digit_2 Csh8_Digit_2 Csh9_Digit_2 Csh10_Digit_2 Csh11_Digit_2 Csh12_Digit_2 Csh13_Digit_2 Csh14_Digit_2 Csh15_Digit_2 Csh16_Digit_2 Csh17_Digit_2 Csh18_Digit_2 Csh19_Digit_2 Csh20_Digit_2 Csh21_Digit_2 Csh22_Digit_2 Csh23_Digit_2 Csh24_Digit_2 Csh25_Digit_2 Csh26_Digit_2 Csh27_Digit_2 Csh28_Digit_2 Csh29_Digit_2 Csh30_Digit_2 Csh31_Digit_2 Csh32_Digit_2 Csh33_Digit_2 Csh34_Digit_2 Csh35_Digit_2 Csh36_Digit_2 Cudig1_Digit_2 Cudig2_Digit_2 Cudig3_Digit_2 Cudig4_Digit_2 Cudig5_Digit_2 Cudig6_Digit_2 Cudig7_Digit_2 Cudig8_Digit_2 Cudig9_Digit_2 Cudig10_Digit_2 Cudig11_Digit_2 LrefGND1_Digit_2 R1_Digit_2 R2_Digit_2 R3_Digit_2 R4_Digit_2 R5_Digit_2 R6_Digit_2 R7_Digit_2 R8_Digit_2 R9_Digit_2 R10_Digit_2 R11_Digit_2 R12_Digit_2 R13_Digit_2 R14_Digit_2 R15_Digit_2 R16_Digit_2 R17_Digit_2 R18_Digit_2 R19_Digit_2 R20_Digit_2 R21_Digit_2 R22_Digit_2 R23_Digit_2 R24_Digit_2 R25_Digit_2 R26_Digit_2 R27_Digit_2 R28_Digit_2 R29_Digit_2 R30_Digit_2 R31_Digit_2 R32_Digit_2 R33_Digit_2 R34_Digit_2 R35_Digit_2 R36_Digit_2 R37_Digit_2 R38_Digit_2 R40_Digit_2 R41_Digit_2 Rsh1_Digit_2 Rsh2_Digit_2 Rsh3_Digit_2 Rsh4_Digit_2 Rsh5_Digit_2 Rsh6_Digit_2 Rsh7_Digit_2 Rsh8_Digit_2 Rsh9_Digit_2 Rsh10_Digit_2 Rsh11_Digit_2 Rsh12_Digit_2 Rsh13_Digit_2 Rsh14_Digit_2 Rsh15_Digit_2 Rsh16_Digit_2 Rsh17_Digit_2 Rsh18_Digit_2 Rsh19_Digit_2 Rsh20_Digit_2 Rsh21_Digit_2 Rsh22_Digit_2 Rsh23_Digit_2 Rsh24_Digit_2 Rsh25_Digit_2 Rsh26_Digit_2 Rsh27_Digit_2 Rsh28_Digit_2 Rsh29_Digit_2 Rsh30_Digit_2 Rsh31_Digit_2 Rsh32_Digit_2 Rsh33_Digit_2 Rsh34_Digit_2 Rsh35_Digit_2 Rsh36_Digit_2 Rsh37_Digit_2 Rsh38_Digit_2 Rsh39_Digit_2 Rsh40_Digit_2 Rsh41_Digit_2 Rsh42_Digit_2 Rsh43_Digit_2 Rsh44_Digit_2 Rsh45_Digit_2 Rsh46_Digit_2 Rsh47_Digit_2 Rsh48_Digit_2 Rsh49_Digit_2 Rsh50_Digit_2 Rsh51_Digit_2 Rsh52_Digit_2 Rsh53_Digit_2 Rsh54_Digit_2 Rsh55_Digit_2 Rsh56_Digit_2 Rsh57_Digit_2 Rsh58_Digit_2 Rsh59_Digit_2 Rsh60_Digit_2 U1_Digit_2 U2_Digit_2 U3_Digit_2 Ush1_Digit_2 Ush2_Digit_2 Ush3_Digit_2 Ush4_Digit_2 Ush5_Digit_2 Ush6_Digit_2 Ush7_Digit_2 Ush8_Digit_2 Usup1_Digit_2
component class Digit_1: C1_Digit_1 C2_Digit_1 C3_Digit_1 C4_Digit_1 C9_Digit_1 C10_Digit_1 C11_Digit_1 C12_Digit_1 C13_Digit_1 C14_Digit_1 C15_Digit_1 C16_Digit_1 C84_Digit_1 Csh1_Digit_1 Csh2_Digit_1 Csh3_Digit_1 Csh4_Digit_1 Csh5_Digit_1 Csh6_Digit_1 Csh7_Digit_1 Csh8_Digit_1 Csh9_Digit_1 Csh10_Digit_1 Csh11_Digit_1 Csh12_Digit_1 Csh13_Digit_1 Csh14_Digit_1 Csh15_Digit_1 Csh16_Digit_1 Csh17_Digit_1 Csh18_Digit_1 Csh19_Digit_1 Csh20_Digit_1 Csh21_Digit_1 Csh22_Digit_1 Csh23_Digit_1 Csh24_Digit_1 Csh25_Digit_1 Csh26_Digit_1 Csh27_Digit_1 Csh28_Digit_1 Csh29_Digit_1 Csh30_Digit_1 Csh31_Digit_1 Csh32_Digit_1 Csh33_Digit_1 Csh34_Digit_1 Csh35_Digit_1 Csh36_Digit_1 Cudig1_Digit_1 Cudig2_Digit_1 Cudig3_Digit_1 Cudig4_Digit_1 Cudig5_Digit_1 Cudig6_Digit_1 Cudig7_Digit_1 Cudig8_Digit_1 Cudig9_Digit_1 Cudig10_Digit_1 Cudig11_Digit_1 LrefGND1_Digit_1 R1_Digit_1 R2_Digit_1 R3_Digit_1 R4_Digit_1 R5_Digit_1 R6_Digit_1 R7_Digit_1 R8_Digit_1 R9_Digit_1 R10_Digit_1 R11_Digit_1 R12_Digit_1 R13_Digit_1 R14_Digit_1 R15_Digit_1 R16_Digit_1 R17_Digit_1 R18_Digit_1 R19_Digit_1 R20_Digit_1 R21_Digit_1 R22_Digit_1 R23_Digit_1 R24_Digit_1 R25_Digit_1 R26_Digit_1 R27_Digit_1 R28_Digit_1 R29_Digit_1 R30_Digit_1 R31_Digit_1 R32_Digit_1 R33_Digit_1 R34_Digit_1 R35_Digit_1 R36_Digit_1 R37_Digit_1 R38_Digit_1 R40_Digit_1 R41_Digit_1 Rsh1_Digit_1 Rsh2_Digit_1 Rsh3_Digit_1 Rsh4_Digit_1 Rsh5_Digit_1 Rsh6_Digit_1 Rsh7_Digit_1 Rsh8_Digit_1 Rsh9_Digit_1 Rsh10_Digit_1 Rsh11_Digit_1 Rsh12_Digit_1 Rsh13_Digit_1 Rsh14_Digit_1 Rsh15_Digit_1 Rsh16_Digit_1 Rsh17_Digit_1 Rsh18_Digit_1 Rsh19_Digit_1 Rsh20_Digit_1 Rsh21_Digit_1 Rsh22_Digit_1 Rsh23_Digit_1 Rsh24_Digit_1 Rsh25_Digit_1 Rsh26_Digit_1 Rsh27_Digit_1 Rsh28_Digit_1 Rsh29_Digit_1 Rsh30_Digit_1 Rsh31_Digit_1 Rsh32_Digit_1 Rsh33_Digit_1 Rsh34_Digit_1 Rsh35_Digit_1 Rsh36_Digit_1 Rsh37_Digit_1 Rsh38_Digit_1 Rsh39_Digit_1 Rsh40_Digit_1 Rsh41_Digit_1 Rsh42_Digit_1 Rsh43_Digit_1 Rsh44_Digit_1 Rsh45_Digit_1 Rsh46_Digit_1 Rsh47_Digit_1 Rsh48_Digit_1 Rsh49_Digit_1 Rsh50_Digit_1 Rsh51_Digit_1 Rsh52_Digit_1 Rsh53_Digit_1 Rsh54_Digit_1 Rsh55_Digit_1 Rsh56_Digit_1 Rsh57_Digit_1 Rsh58_Digit_1 Rsh59_Digit_1 Rsh60_Digit_1 U1_Digit_1 U2_Digit_1 U3_Digit_1 Ush1_Digit_1 Ush2_Digit_1 Ush3_Digit_1 Ush4_Digit_1 Ush5_Digit_1 Ush6_Digit_1 Ush7_Digit_1 Ush8_Digit_1 Usup1_Digit_1
net class TXD[3..0]: TXD0 TXD1 TXD2 TXD3
net class RXD[3..0]: RXD0 RXD1 RXD2 RXD3
channel class Digit: Digit_1 Digit_2 Digit_3 Digit_4 Digit_5 Digit_6
component class FPGA: C17 C18 C19 C20 C21 C22 C23 C24 C25 C26 C27 C28 C29 C30 C31 C32 C33 C34 C35 C36 C37 C38 C39 C40 C41 C42 C43 C44 C45 C46 C47 C48 C49 C50 C51 C52 C53 C54 C55 ExtReset1 R37 R38 R39 R40 R41 R42 R43 U4 U5 U6 U7
component class Timing: Cclk1 Cgen1 Uclk1 UG1 UG2 UG3
component class "Main schem": CLED1 CLED2 CLED3 CLED4 LX1 RLED1 RLED2 RLED3 VDLED1 VDLED2 VDLED3
component class "U_Ref&Supply unit": Csup1 Csup2 Csup3 Csup4 Csup5 Csup6 Csup7 Csup8 Csup9 Csup10 Csup11 Csup12 Csup13 Csup14 Csup15 Csup16 Csup17 Csup18 Csup19 Csup20 Csup21 Csup22 Csup_1 Rref1 Rref2 Uref2 Uref3 Uref4 Uref5 Uref6 Uref7 Uref8 VD1 VD2
net class ETHRXD[3..0]: ETHRXD0 ETHRXD1 ETHRXD2 ETHRXD3
net class ETHTXD[3..0]: ETHTXD0 ETHTXD1 ETHTXD2 ETHTXD3
differential pair ADC_3_CLK: +ADC_3_CLK_P -ADC_3_CLK_N
differential pair ADC_2_CLK: +ADC_2_CLK_P -ADC_2_CLK_N
differential pair ADC_1_CLK: +ADC_1_CLK_P -ADC_1_CLK_N

## Components (designator, comment, footprint, x,y, rotation, side; value= is the part's Value field where it differs from the comment)
C1_Digit_1 "10uF" chip0603#1 110.4,168.2 r180 bottom (schematic designator C1)
C1_Digit_2 "10uF" chip0603#1 110.4,145.4 r180 bottom (schematic designator C1)
C1_Digit_3 "10uF" chip0603#1 110.4,88.7 r180 bottom (schematic designator C1)
C2_Digit_1 "0.1uF" chip0603#1 106.5,163 r180 bottom (schematic designator C2)
C2_Digit_2 "0.1uF" chip0603#1 106.5,140.2 r180 bottom (schematic designator C2)
C2_Digit_3 "0.1uF" chip0603#1 106.5,83.5 r180 bottom (schematic designator C2)
C3_Digit_1 "10uF" chip0603#1 110.4,157 r180 bottom (schematic designator C3)
C3_Digit_2 "10uF" chip0603#1 110.4,100.2 r180 bottom (schematic designator C3)
C3_Digit_3 "10uF" chip0603#1 110.4,77.5 r180 bottom (schematic designator C3)
C4_Digit_1 "0.1uF" chip0603#1 106.5,151.8 r180 bottom (schematic designator C4)
C4_Digit_2 "0.1uF" chip0603#1 106.5,95 r180 bottom (schematic designator C4)
C4_Digit_3 "0.1uF" chip0603#1 106.5,72.3 r180 bottom (schematic designator C4)
C9_Digit_1 "56pF" ? 107.3,171.1 r180 bottom (schematic designator C9)
C9_Digit_2 "56pF" ? 107.332,148.3 r180 bottom (schematic designator C9)
C9_Digit_3 "56pF" ? 107.332,91.6 r180 bottom (schematic designator C9)
C10_Digit_1 "56pF" ? 105.5,169.5 r0 bottom (schematic designator C10)
C10_Digit_2 "56pF" ? 105.532,146.7 r0 bottom (schematic designator C10)
C10_Digit_3 "56pF" ? 105.532,90 r0 bottom (schematic designator C10)
C11_Digit_1 "56pF" ? 107.3,166 r180 bottom (schematic designator C11)
C11_Digit_2 "56pF" ? 107.3,143.2 r180 bottom (schematic designator C11)
C11_Digit_3 "56pF" ? 107.3,86.5 r180 bottom (schematic designator C11)
C12_Digit_1 "56pF" ? 105.5,164.5 r0 bottom (schematic designator C12)
C12_Digit_2 "56pF" ? 105.5,141.7 r0 bottom (schematic designator C12)
C12_Digit_3 "56pF" ? 105.5,85 r0 bottom (schematic designator C12)
C13_Digit_1 "56pF" ? 107.332,159.9 r180 bottom (schematic designator C13)
C13_Digit_2 "56pF" ? 107.332,103.1 r180 bottom (schematic designator C13)
C13_Digit_3 "56pF" ? 107.332,80.4 r180 bottom (schematic designator C13)
C14_Digit_1 "56pF" ? 105.532,158.3 r0 bottom (schematic designator C14)
C14_Digit_2 "56pF" ? 105.532,101.5 r0 bottom (schematic designator C14)
C14_Digit_3 "56pF" ? 105.532,78.8 r0 bottom (schematic designator C14)
C15_Digit_1 "56pF" ? 107.3,154.8 r180 bottom (schematic designator C15)
C15_Digit_2 "56pF" ? 107.3,98 r180 bottom (schematic designator C15)
C15_Digit_3 "56pF" ? 107.3,75.3 r180 bottom (schematic designator C15)
C16_Digit_1 "56pF" ? 105.5,153.3 r0 bottom (schematic designator C16)
C16_Digit_2 "56pF" ? 105.5,96.5 r0 bottom (schematic designator C16)
C16_Digit_3 "56pF" ? 105.5,73.8 r0 bottom (schematic designator C16)
C17 "0.1uF" 0402 147.7,118.2 r180 bottom
C18 "0.1uF" 0402 140.4,120 r270 bottom
C19 "0.1uF" 0402 134.2,131.8 r0 bottom
C20 "0.1uF" 0402 134.2,117.2 r0 bottom
C21 "0.1uF" 0402 149.7,116.8 r180 bottom
C22 "0.1uF" 0402 148.3,116.3 r90 bottom
C23 "0.1uF" 0402 149.7,118.8 r180 bottom
C24 "0.1uF" 0402 132.3,122.2 r270 bottom
C25 "0.1uF" 0402 144.7,116.7 r90 bottom
C26 "0.1uF" 0402 141,133 r270 bottom
C27 "0.1uF" 0402 136.3,116.3 r90 bottom
C28 "0.1uF" 0402 133.9,133.4 r225 bottom
C29 "0.1uF" 0402 141,117 r270 bottom
C30 "0.1uF" 0402 149.3,128.8 r180 bottom
C31 "0.1uF" 0402 137.4,133.8 r0 bottom
C32 "0.1uF" 0402 148.3,133 r270 bottom
C33 "0.1uF" 0402 144.3,133.2 r270 bottom
C34 "0.1uF" 0402 132.3,129.8 r0 bottom
C35 "0.1uF" 0402 130.5,136.5 r0 bottom
C36 "0.1uF" 0402 130.5,112.5 r0 bottom
C37 "0.1uF" 0402 151.5,112.5 r180 bottom
C38 "0.1uF" 0402 151.5,136.5 r180 bottom
C39 "0.1uF" 0402 133.2,117.9 r180 bottom
C40 "0.1uF" 0402 147.3,119.3 r135 bottom
C41 "0.1uF" 0402 142.5,121.9 r270 bottom
C42 "0.1uF" 0402 136.7,121.2 r180 bottom
C43 "0.1uF" 0402 139.5,122 r270 bottom
C44 "0.1uF" 0402 143.5,126 r0 bottom
C45 "0.1uF" 0402 139.2,128.3 r315 bottom
C46 "0.1uF" 0402 143.6,123 r0 bottom
C47 "0.1uF" 0402 147.8,130.8 r180 bottom
C48 "0.1uF" 0402 144.3,121.3 r270 bottom
C49 "0.1uF" 0402 137.2,123.3 r315 bottom
C50 "0.1uF" 0402 143.8,128.3 r225 bottom
C51 "0.1uF" 0402 135.5,123.8 r0 bottom
C52 "0.1uF" 0402 137.2,126.3 r315 bottom
C53 "2.2uF" chip0603#2 152.836,115.918 r270 top
C54 "0.1uF" chip0603#1 159.1,125 r90 top
C55 "0.1uF" chip0603#1 172.2,141.5 r90 top
C56 "0.1uF" chip0603#1 135.3,96.5 r180 bottom
C57 "0.1uF" chip0603#1 135.3,99 r180 bottom
C58 "0.1uF" chip0603#1 139.3,96.3 r270 bottom
C59 "0.1uF" chip0603#1 151.5,97.1 r270 top
C60 "0.1uF" chip0603#1 149,94.2 r90 bottom
C61 "0.1uF" chip0603#1 148.5,98.8 r270 top
C62 "0.1uF" chip0603#1 147,95.2 r90 top
C84_Digit_1 "0.47uF" chip0603#1 113,175.5 r180 bottom (schematic designator C84)
C84_Digit_2 "0.47uF" chip0603#1 107.5,113 r0 bottom (schematic designator C84)
C84_Digit_3 "0.47uF" chip0603#1 104.7,67.5 r180 bottom (schematic designator C84)
Cclk1 "0.1uF" chip0603#1 88.1,117.3 r270 top
CFL1 "0.1uF" chip0603#1 153.8,162.7 r90 top
Cgen1 "0.1uF" chip0603#1 91.3,126.3 r180 top
CIO1 "0.1uF" chip0603#1 137.7,162.1 r270 bottom
CIO2 "0.1uF" chip0603#1 142.8,156.7 r180 bottom
CIO3 "0.1uF" chip0603#1 144.3,162.1 r270 bottom
CIO4 "0.1uF" chip0603#1 141,162 r90 bottom
CLED1 "0.1uF" chip0805#1 196.5,160.7 r0 top
CLED2 "0.1uF" 1608[0603] 192.5,157.1 r90 top
CLED3 "0.1uF" 1608[0603] 198.4,157.1 r90 top
CLED4 "0.1uF" 1608[0603] 185.5,157.1 r90 top
CSAin_1 "DHR-26F" DHR-F-26 57.8,140.4 r90 top
CSAin_2 "DHR-26F" DHR-F-26 57.4,72.8 r90 top
Csh1_Digit_1 "0.150uF" chip0603#1 67,169.3 r0 top (schematic designator Csh1)
Csh1_Digit_2 "0.150uF" chip0603#1 67,146.5 r0 top (schematic designator Csh1)
Csh1_Digit_3 "0.150uF" chip0603#1 67,89.8 r0 top (schematic designator Csh1)
Csh2_Digit_1 "0.150uF" chip0603#1 67,172.5 r0 top (schematic designator Csh2)
Csh2_Digit_2 "0.150uF" chip0603#1 67,149.7 r0 top (schematic designator Csh2)
Csh2_Digit_3 "0.150uF" chip0603#1 67,93 r0 top (schematic designator Csh2)
Csh3_Digit_1 "0.150uF" chip0603#1 67,163.6 r0 top (schematic designator Csh3)
Csh3_Digit_2 "0.150uF" chip0603#1 67,140.8 r0 top (schematic designator Csh3)
Csh3_Digit_3 "0.150uF" chip0603#1 67,84.1 r0 top (schematic designator Csh3)
Csh4_Digit_1 "0.150uF" chip0603#1 67,166.8 r0 top (schematic designator Csh4)
Csh4_Digit_2 "0.150uF" chip0603#1 67,144 r0 top (schematic designator Csh4)
Csh4_Digit_3 "0.150uF" chip0603#1 67,87.3 r0 top (schematic designator Csh4)
Csh5_Digit_1 "0.150uF" chip0603#1 67,158.1 r0 top (schematic designator Csh5)
Csh5_Digit_2 "0.150uF" chip0603#1 67,101.3 r0 top (schematic designator Csh5)
Csh5_Digit_3 "0.150uF" chip0603#1 66.988,78.588 r0 top (schematic designator Csh5)
Csh6_Digit_1 "0.150uF" chip0603#1 67,161.3 r0 top (schematic designator Csh6)
Csh6_Digit_2 "0.150uF" chip0603#1 67,104.5 r0 top (schematic designator Csh6)
Csh6_Digit_3 "0.150uF" chip0603#1 67,81.8 r0 top (schematic designator Csh6)
Csh7_Digit_1 "0.150uF" chip0603#1 67,152.4 r0 top (schematic designator Csh7)
Csh7_Digit_2 "0.150uF" chip0603#1 67,95.6 r0 top (schematic designator Csh7)
Csh7_Digit_3 "0.150uF" chip0603#1 67,72.9 r0 top (schematic designator Csh7)
Csh8_Digit_1 "0.150uF" chip0603#1 67,155.6 r0 top (schematic designator Csh8)
Csh8_Digit_2 "0.150uF" chip0603#1 67,98.8 r0 top (schematic designator Csh8)
Csh8_Digit_3 "0.150uF" chip0603#1 67,76.1 r0 top (schematic designator Csh8)
Csh9_Digit_1 "0.1uF" ? 77.8,169.9 r0 bottom (schematic designator Csh9)
Csh9_Digit_2 "0.1uF" ? 77.8,147.1 r0 bottom (schematic designator Csh9)
Csh9_Digit_3 "0.1uF" ? 77.8,90.4 r0 bottom (schematic designator Csh9)
Csh10_Digit_1 "0.1uF" ? 77.8,164.2 r0 bottom (schematic designator Csh10)
Csh10_Digit_2 "0.1uF" ? 77.8,141.4 r0 bottom (schematic designator Csh10)
Csh10_Digit_3 "0.1uF" ? 77.8,84.7 r0 bottom (schematic designator Csh10)
Csh11_Digit_1 "0.1uF" ? 77.8,158.7 r0 bottom (schematic designator Csh11)
Csh11_Digit_2 "0.1uF" ? 77.8,101.9 r0 bottom (schematic designator Csh11)
Csh11_Digit_3 "0.1uF" ? 77.8,79.2 r0 bottom (schematic designator Csh11)
Csh12_Digit_1 "0.1uF" ? 77.8,153 r0 bottom (schematic designator Csh12)
Csh12_Digit_2 "0.1uF" ? 77.8,96.2 r0 bottom (schematic designator Csh12)
Csh12_Digit_3 "0.1uF" ? 77.8,73.5 r0 bottom (schematic designator Csh12)
Csh13_Digit_1 "20pF" ? 79.6,172.3 r180 top (schematic designator Csh13)
Csh13_Digit_2 "20pF" ? 79.6,149.5 r180 top (schematic designator Csh13)
Csh13_Digit_3 "20pF" ? 79.6,92.8 r180 top (schematic designator Csh13)
Csh14_Digit_1 "20pF" ? 79.6,166.6 r180 top (schematic designator Csh14)
Csh14_Digit_2 "20pF" ? 79.6,143.8 r180 top (schematic designator Csh14)
Csh14_Digit_3 "20pF" ? 79.6,87.1 r180 top (schematic designator Csh14)
Csh15_Digit_1 "20pF" ? 79.6,161.1 r180 top (schematic designator Csh15)
Csh15_Digit_2 "20pF" ? 79.6,104.3 r180 top (schematic designator Csh15)
Csh15_Digit_3 "20pF" ? 79.6,81.6 r180 top (schematic designator Csh15)
Csh16_Digit_1 "20pF" ? 79.6,155.4 r180 top (schematic designator Csh16)
Csh16_Digit_2 "20pF" ? 79.6,98.6 r180 top (schematic designator Csh16)
Csh16_Digit_3 "20pF" ? 79.6,75.9 r180 top (schematic designator Csh16)
Csh17_Digit_1 "20pF" ? 80.2,169.5 r180 top (schematic designator Csh17)
Csh17_Digit_2 "20pF" ? 80.2,146.7 r180 top (schematic designator Csh17)
Csh17_Digit_3 "20pF" ? 80.2,90 r180 top (schematic designator Csh17)
Csh18_Digit_1 "20pF" ? 80.2,163.8 r180 top (schematic designator Csh18)
Csh18_Digit_2 "20pF" ? 80.2,141 r180 top (schematic designator Csh18)
Csh18_Digit_3 "20pF" ? 80.2,84.3 r180 top (schematic designator Csh18)
Csh19_Digit_1 "20pF" ? 80.2,158.3 r180 top (schematic designator Csh19)
Csh19_Digit_2 "20pF" ? 80.2,101.5 r180 top (schematic designator Csh19)
Csh19_Digit_3 "20pF" ? 80.2,78.8 r180 top (schematic designator Csh19)
Csh20_Digit_1 "20pF" ? 80.2,152.6 r180 top (schematic designator Csh20)
Csh20_Digit_2 "20pF" ? 80.2,95.8 r180 top (schematic designator Csh20)
Csh20_Digit_3 "20pF" ? 80.2,73.1 r180 top (schematic designator Csh20)
Csh21_Digit_1 "0.1uF" ? 84.2,172.1 r180 bottom (schematic designator Csh21)
Csh21_Digit_2 "0.1uF" ? 84.2,149.3 r180 bottom (schematic designator Csh21)
Csh21_Digit_3 "0.1uF" ? 84.2,92.6 r180 bottom (schematic designator Csh21)
Csh22_Digit_1 "0.1uF" ? 84.2,166.4 r180 bottom (schematic designator Csh22)
Csh22_Digit_2 "0.1uF" ? 84.2,143.6 r180 bottom (schematic designator Csh22)
Csh22_Digit_3 "0.1uF" ? 84.2,86.9 r180 bottom (schematic designator Csh22)
Csh23_Digit_1 "0.1uF" ? 84.2,160.9 r180 bottom (schematic designator Csh23)
Csh23_Digit_2 "0.1uF" ? 84.2,104.1 r180 bottom (schematic designator Csh23)
Csh23_Digit_3 "0.1uF" ? 84.2,81.4 r180 bottom (schematic designator Csh23)
Csh24_Digit_1 "0.1uF" ? 84.2,155.2 r180 bottom (schematic designator Csh24)
Csh24_Digit_2 "0.1uF" ? 84.2,98.4 r180 bottom (schematic designator Csh24)
Csh24_Digit_3 "0.1uF" ? 84.2,75.7 r180 bottom (schematic designator Csh24)
Csh25_Digit_1 "20pF" ? 86.1,174.3 r180 top (schematic designator Csh25)
Csh25_Digit_2 "20pF" ? 86.1,151.5 r180 top (schematic designator Csh25)
Csh25_Digit_3 "20pF" ? 86.1,94.8 r180 top (schematic designator Csh25)
Csh26_Digit_1 "20pF" ? 86.1,168.6 r180 top (schematic designator Csh26)
Csh26_Digit_2 "20pF" ? 86.1,145.8 r180 top (schematic designator Csh26)
Csh26_Digit_3 "20pF" ? 86.1,89.1 r180 top (schematic designator Csh26)
Csh27_Digit_1 "20pF" ? 86.1,163.1 r180 top (schematic designator Csh27)
Csh27_Digit_2 "20pF" ? 86.1,106.3 r180 top (schematic designator Csh27)
Csh27_Digit_3 "20pF" ? 86.1,83.6 r180 top (schematic designator Csh27)
Csh28_Digit_1 "20pF" ? 86.1,157.4 r180 top (schematic designator Csh28)
Csh28_Digit_2 "20pF" ? 86.1,100.6 r180 top (schematic designator Csh28)
Csh28_Digit_3 "20pF" ? 86.1,77.9 r180 top (schematic designator Csh28)
Csh29_Digit_1 "20pF" ? 88.3,173.5 r0 top (schematic designator Csh29)
Csh29_Digit_2 "20pF" ? 88.3,150.7 r0 top (schematic designator Csh29)
Csh29_Digit_3 "20pF" ? 88.3,94 r0 top (schematic designator Csh29)
Csh30_Digit_1 "20pF" ? 88.3,167.8 r0 top (schematic designator Csh30)
Csh30_Digit_2 "20pF" ? 88.3,145 r0 top (schematic designator Csh30)
Csh30_Digit_3 "20pF" ? 88.3,88.3 r0 top (schematic designator Csh30)
Csh31_Digit_1 "20pF" ? 88.3,162.3 r0 top (schematic designator Csh31)
Csh31_Digit_2 "20pF" ? 88.3,105.5 r0 top (schematic designator Csh31)
Csh31_Digit_3 "20pF" ? 88.3,82.8 r0 top (schematic designator Csh31)
Csh32_Digit_1 "20pF" ? 88.3,156.6 r0 top (schematic designator Csh32)
Csh32_Digit_2 "20pF" ? 88.3,99.8 r0 top (schematic designator Csh32)
Csh32_Digit_3 "20pF" ? 88.3,77.1 r0 top (schematic designator Csh32)
Csh33_Digit_1 "1uF" ? 92.1,171.8 r270 top (schematic designator Csh33)
Csh33_Digit_2 "1uF" ? 92.1,149 r270 top (schematic designator Csh33)
Csh33_Digit_3 "1uF" ? 92.1,92.3 r270 top (schematic designator Csh33)
Csh34_Digit_1 "1uF" ? 92.1,166.1 r270 top (schematic designator Csh34)
Csh34_Digit_2 "1uF" ? 92.1,143.3 r270 top (schematic designator Csh34)
Csh34_Digit_3 "1uF" ? 92.1,86.6 r270 top (schematic designator Csh34)
Csh35_Digit_1 "1uF" ? 92.1,160.6 r270 top (schematic designator Csh35)
Csh35_Digit_2 "1uF" ? 92.1,103.8 r270 top (schematic designator Csh35)
Csh35_Digit_3 "1uF" ? 92.1,81.1 r270 top (schematic designator Csh35)
Csh36_Digit_1 "1uF" ? 92.1,154.9 r270 top (schematic designator Csh36)
Csh36_Digit_2 "1uF" ? 92.1,98.1 r270 top (schematic designator Csh36)
Csh36_Digit_3 "1uF" ? 92.1,75.4 r270 top (schematic designator Csh36)
CSL1 "0.47uF" chip0603#1 152.5,189.35 r270 top
CSL2 "0.47uF" chip0603#1 152.5,179.35 r270 top
Csup1 "0.47uF" chip0603#1 147,56 r270 top
Csup2 "100uF" CEL-SMD300 155.4,75.5 r90 top
Csup3 "0.47uF" chip0603#1 143,76.2 r180 top
Csup4 "0.47uF" chip0603#1 99.6,137.5 r180 top
Csup5 "0.47uF" chip0603#1 127,74.7 r180 top
Csup6 "0.47uF" chip0603#1 143.5,85.6 r180 top
Csup7 "0.47uF" chip0603#1 151.7,75.2 r90 top
Csup8 "0.47uF" chip0603#1 74,119.2 r270 top
Csup9 "100uF" CEL-SMD300 61.88,124.9 r0 top
Csup10 "100uF" CEL-SMD300 78,135.1 r270 bottom
Csup11 "100uF" CEL-SMD300 120,65.5 r0 top
Csup12 "100uF" CEL-SMD300 134.58,63.8 r0 bottom
Csup13 "100uF" CEL-SMD300 91.7,133.2 r0 bottom
Csup14 "100uF" CEL-SMD300 135.8,72.3 r0 bottom
Csup15 "100uF" CEL-SMD300 135.7,80.8 r0 bottom
Csup16 "0.47uF" chip0603#1 81.5,135 r270 bottom
Csup17 "0.47uF" chip0603#1 117,65.5 r180 top
Csup18 "0.47uF" chip0603#1 136.051,66.9 r0 bottom
Csup19 "0.47uF" chip0603#1 92.2,137.5 r0 top
Csup20 "0.47uF" chip0603#1 136.5,76.5 r180 top
Csup21 "0.47uF" chip0603#1 136.5,85.5 r180 top
Csup22 "0.47uF" chip0603#1 72.5,121.5 r90 top
Csup_1 "100uF" CEL-SMD300 143.1,56.3 r180 top
Cudig1_Digit_1 "0.1uF" ? 101,167.2 r180 bottom (schematic designator Cudig1)
Cudig1_Digit_2 "0.1uF" chip0603#1 102,143.4 r270 bottom (schematic designator Cudig1)
Cudig1_Digit_3 "0.1uF" chip0603#1 102,86.7 r270 bottom (schematic designator Cudig1)
Cudig2_Digit_1 "0.1uF" ? 102,166.2 r270 bottom (schematic designator Cudig2)
Cudig2_Digit_2 "0.1uF" chip0603#1 101,144.4 r180 bottom (schematic designator Cudig2)
Cudig2_Digit_3 "0.1uF" chip0603#1 101,87.7 r180 bottom (schematic designator Cudig2)
Cudig3_Digit_1 "0.1uF" ? 101,156 r180 bottom (schematic designator Cudig3)
Cudig3_Digit_2 "0.1uF" chip0603#1 102,98.2 r270 bottom (schematic designator Cudig3)
Cudig3_Digit_3 "0.1uF" chip0603#1 101,76.5 r180 bottom (schematic designator Cudig3)
Cudig4_Digit_1 "0.1uF" ? 102,155 r270 bottom (schematic designator Cudig4)
Cudig4_Digit_2 "0.1uF" chip0603#1 101,99.2 r180 bottom (schematic designator Cudig4)
Cudig4_Digit_3 "0.1uF" chip0603#1 102,75.5 r270 bottom (schematic designator Cudig4)
Cudig5_Digit_1 "0.1uF" ? 103,156.1 r0 bottom (schematic designator Cudig5)
Cudig5_Digit_2 "0.1uF" chip0603#1 103,144.5 r0 bottom (schematic designator Cudig5)
Cudig5_Digit_3 "0.1uF" chip0603#1 103,87.8 r0 bottom (schematic designator Cudig5)
Cudig6_Digit_1 "0.1uF" ? 102,168.3 r90 bottom (schematic designator Cudig6)
Cudig6_Digit_2 "0.1uF" chip0603#1 102,145.5 r90 bottom (schematic designator Cudig6)
Cudig6_Digit_3 "0.1uF" chip0603#1 102,88.8 r90 bottom (schematic designator Cudig6)
Cudig7_Digit_1 "0.1uF" ? 103,167.3 r0 bottom (schematic designator Cudig7)
Cudig7_Digit_2 "0.1uF" chip0603#1 102,100.2 r90 bottom (schematic designator Cudig7)
Cudig7_Digit_3 "0.1uF" chip0603#1 102,77.5 r90 bottom (schematic designator Cudig7)
Cudig8_Digit_1 "0.1uF" ? 102,157.1 r90 bottom (schematic designator Cudig8)
Cudig8_Digit_2 "0.1uF" chip0603#1 103,99.3 r0 bottom (schematic designator Cudig8)
Cudig8_Digit_3 "0.1uF" chip0603#1 103,76.6 r0 bottom (schematic designator Cudig8)
Cudig9_Digit_1 "0.1uF" ? 118,165.5 r90 bottom (schematic designator Cudig9)
Cudig9_Digit_2 "0.1uF" ? 118,125.8 r90 bottom (schematic designator Cudig9)
Cudig9_Digit_3 "0.1uF" ? 118,86 r90 bottom (schematic designator Cudig9)
Cudig10_Digit_1 "0.1uF" ? 118,162.1 r0 bottom (schematic designator Cudig10)
Cudig10_Digit_2 "0.1uF" ? 118,122.4 r0 bottom (schematic designator Cudig10)
Cudig10_Digit_3 "0.1uF" ? 118,82.6 r0 bottom (schematic designator Cudig10)
Cudig11_Digit_1 "0.1uF" ? 118,158.6 r270 bottom (schematic designator Cudig11)
Cudig11_Digit_2 "0.1uF" ? 118,118.9 r270 bottom (schematic designator Cudig11)
Cudig11_Digit_3 "0.1uF" ? 118,79.1 r270 bottom (schematic designator Cudig11)
ExtReset1 "1k" chip0603#1 158.3,114.6 r270 top
JEth1 "HR961160C" HR961160C 157,105.95 r270 top
L1 "DR" chip0805#2 133.76,94.5 r0 bottom
L2 "DR" chip0805#2 144.2,96 r0 bottom
LrefGND1_Digit_1 "100mkH" chip0805#2 110.5,150.5 r0 bottom (schematic designator LrefGND1)
LrefGND1_Digit_2 "100mkH" chip0805#2 114.6,130.9 r0 bottom (schematic designator LrefGND1)
LrefGND1_Digit_3 "100mkH" chip0805#2 110.8,94 r0 bottom (schematic designator LrefGND1)
LX1 "CWF-4-R" CWF-4R 165,63 r0 top
R1_Digit_1 "51" ? 94.8,171.9 r0 top (schematic designator R1)
R1_Digit_2 "51" ? 94.8,149.1 r0 top (schematic designator R1)
R1_Digit_3 "51" ? 94.8,92.4 r0 top (schematic designator R1)
R2_Digit_1 "51" ? 94.8,162.5 r0 top (schematic designator R2)
R2_Digit_2 "51" ? 94.8,139.7 r0 top (schematic designator R2)
R2_Digit_3 "51" ? 94.8,83 r0 top (schematic designator R2)
R3_Digit_1 "51" ? 94.8,160.7 r0 top (schematic designator R3)
R3_Digit_2 "51" ? 94.8,103.9 r0 top (schematic designator R3)
R3_Digit_3 "51" ? 94.8,81.2 r0 top (schematic designator R3)
R4_Digit_1 "51" ? 94.8,151 r0 top (schematic designator R4)
R4_Digit_2 "51" ? 94.8,94.2 r0 top (schematic designator R4)
R4_Digit_3 "51" ? 94.8,71.5 r0 top (schematic designator R4)
R5_Digit_1 "510" ? 96.6,170.4 r180 top (schematic designator R5)
R5_Digit_2 "510" ? 96.6,147.6 r180 top (schematic designator R5)
R5_Digit_3 "510" ? 96.6,90.9 r180 top (schematic designator R5)
R6_Digit_1 "510" ? 95.7,169.1 r180 top (schematic designator R6)
R6_Digit_2 "510" ? 95.7,146.3 r180 top (schematic designator R6)
R6_Digit_3 "510" ? 95.7,89.6 r180 top (schematic designator R6)
R7_Digit_1 "510" ? 95.7,165.3 r180 top (schematic designator R7)
R7_Digit_2 "510" ? 95.7,142.5 r180 top (schematic designator R7)
R7_Digit_3 "510" ? 95.7,85.8 r180 top (schematic designator R7)
R8_Digit_1 "510" ? 96.6,164 r180 top (schematic designator R8)
R8_Digit_2 "510" ? 96.6,141.2 r180 top (schematic designator R8)
R8_Digit_3 "510" ? 96.6,84.5 r180 top (schematic designator R8)
R9_Digit_1 "510" ? 96.6,159.2 r180 top (schematic designator R9)
R9_Digit_2 "510" ? 96.6,102.4 r180 top (schematic designator R9)
R9_Digit_3 "510" ? 96.6,79.7 r180 top (schematic designator R9)
R10_Digit_1 "510" ? 95.7,157.9 r180 top (schematic designator R10)
R10_Digit_2 "510" ? 95.7,101.1 r180 top (schematic designator R10)
R10_Digit_3 "510" ? 95.7,78.4 r180 top (schematic designator R10)
R11_Digit_1 "510" ? 95.6,154.1 r180 top (schematic designator R11)
R11_Digit_2 "510" ? 95.6,97.3 r180 top (schematic designator R11)
R11_Digit_3 "510" ? 95.6,74.6 r180 top (schematic designator R11)
R12_Digit_1 "510" ? 96.6,152.8 r180 top (schematic designator R12)
R12_Digit_2 "510" ? 96.6,96 r180 top (schematic designator R12)
R12_Digit_3 "510" ? 96.6,73.3 r180 top (schematic designator R12)
R13_Digit_1 "1k" ? 98,170.4 r0 top (schematic designator R13)
R13_Digit_2 "1k" ? 98,147.6 r0 top (schematic designator R13)
R13_Digit_3 "1k" ? 98,90.9 r0 top (schematic designator R13)
R14_Digit_1 "1k" ? 96.6,167.9 r180 top (schematic designator R14)
R14_Digit_2 "1k" ? 96.6,145.1 r180 top (schematic designator R14)
R14_Digit_3 "1k" ? 96.6,88.4 r180 top (schematic designator R14)
R15_Digit_1 "1k" ? 94.8,166.5 r0 top (schematic designator R15)
R15_Digit_2 "1k" ? 94.8,143.7 r0 top (schematic designator R15)
R15_Digit_3 "1k" ? 94.8,87 r0 top (schematic designator R15)
R16_Digit_1 "1k" ? 99.8,164 r180 top (schematic designator R16)
R16_Digit_2 "1k" ? 99.8,141.2 r180 top (schematic designator R16)
R16_Digit_3 "1k" ? 99.8,84.5 r180 top (schematic designator R16)
R17_Digit_1 "1k" ? 98,159.2 r0 top (schematic designator R17)
R17_Digit_2 "1k" ? 98,102.4 r0 top (schematic designator R17)
R17_Digit_3 "1k" ? 98,79.7 r0 top (schematic designator R17)
R18_Digit_1 "1k" ? 96.6,156.7 r180 top (schematic designator R18)
R18_Digit_2 "1k" ? 96.6,99.9 r180 top (schematic designator R18)
R18_Digit_3 "1k" ? 96.6,77.2 r180 top (schematic designator R18)
R19_Digit_1 "1k" ? 94.8,155.3 r0 top (schematic designator R19)
R19_Digit_2 "1k" ? 94.8,98.5 r0 top (schematic designator R19)
R19_Digit_3 "1k" ? 94.8,75.8 r0 top (schematic designator R19)
R20_Digit_1 "1k" ? 99.8,152.8 r180 top (schematic designator R20)
R20_Digit_2 "1k" ? 99.8,96 r180 top (schematic designator R20)
R20_Digit_3 "1k" ? 99.8,73.3 r180 top (schematic designator R20)
R21_Digit_1 "100" chip0603#1 105.5,171.1 r0 top (schematic designator R21)
R21_Digit_2 "100" chip0603#1 105.532,148.3 r0 top (schematic designator R21)
R21_Digit_3 "100" chip0603#1 105.532,91.6 r0 top (schematic designator R21)
R22_Digit_1 "100" chip0603#1 105.5,169.5 r0 top (schematic designator R22)
R22_Digit_2 "100" chip0603#1 105.532,146.7 r0 top (schematic designator R22)
R22_Digit_3 "100" chip0603#1 105.532,90 r0 top (schematic designator R22)
R23_Digit_1 "100" chip0603#1 105.5,166 r0 top (schematic designator R23)
R23_Digit_2 "100" chip0603#1 105.5,143.2 r0 top (schematic designator R23)
R23_Digit_3 "100" chip0603#1 105.5,86.5 r0 top (schematic designator R23)
R24_Digit_1 "100" chip0603#1 105.5,164.5 r0 top (schematic designator R24)
R24_Digit_2 "100" chip0603#1 105.5,141.7 r0 top (schematic designator R24)
R24_Digit_3 "100" chip0603#1 105.5,85 r0 top (schematic designator R24)
R25_Digit_1 "100" chip0603#1 105.532,159.9 r0 top (schematic designator R25)
R25_Digit_2 "100" chip0603#1 105.532,103.1 r0 top (schematic designator R25)
R25_Digit_3 "100" chip0603#1 105.532,80.4 r0 top (schematic designator R25)
R26_Digit_1 "100" chip0603#1 105.532,158.3 r0 top (schematic designator R26)
R26_Digit_2 "100" chip0603#1 105.532,101.5 r0 top (schematic designator R26)
R26_Digit_3 "100" chip0603#1 105.532,78.8 r0 top (schematic designator R26)
R27_Digit_1 "100" chip0603#1 105.5,154.8 r0 top (schematic designator R27)
R27_Digit_2 "100" chip0603#1 105.5,98 r0 top (schematic designator R27)
R27_Digit_3 "100" chip0603#1 105.5,75.3 r0 top (schematic designator R27)
R28_Digit_1 "100" chip0603#1 105.5,153.3 r0 top (schematic designator R28)
R28_Digit_2 "100" chip0603#1 105.5,96.5 r0 top (schematic designator R28)
R28_Digit_3 "100" chip0603#1 105.5,73.8 r0 top (schematic designator R28)
R29_Digit_1 "100" 0402 128,165.5 r0 top (schematic designator R29)
R29_Digit_2 "100" 0402 123.5,128.5 r90 top (schematic designator R29)
R29_Digit_3 "100" 0402 120.5,91 r180 top (schematic designator R29)
R30_Digit_1 "100" 0402 130,166.5 r0 top (schematic designator R30)
R30_Digit_2 "100" 0402 123.5,130.5 r90 top (schematic designator R30)
R30_Digit_3 "100" 0402 118.5,92 r180 top (schematic designator R30)
R31_Digit_1 "100" 0402 126,164.5 r180 top (schematic designator R31)
R31_Digit_2 "100" 0402 123.5,126.5 r270 top (schematic designator R31)
R31_Digit_3 "100" 0402 122.5,92 r0 top (schematic designator R31)
R32_Digit_1 "100" 0402 124,163.5 r180 top (schematic designator R32)
R32_Digit_2 "100" 0402 123.5,124.5 r270 top (schematic designator R32)
R32_Digit_3 "100" 0402 124.5,91 r0 top (schematic designator R32)
R33_Digit_1 "100" 0402 125,153 r180 top (schematic designator R33)
R33_Digit_2 "100" 0402 123.5,120 r270 top (schematic designator R33)
R33_Digit_3 "100" 0402 124,81 r0 top (schematic designator R33)
R34_Digit_1 "100" 0402 123,154.5 r180 top (schematic designator R34)
R34_Digit_2 "100" 0402 123.5,118 r270 top (schematic designator R34)
R34_Digit_3 "100" 0402 126,80 r0 top (schematic designator R34)
R35_Digit_1 "100" 0402 121,153 r180 top (schematic designator R35)
R35_Digit_2 "100" 0402 123.5,116 r270 top (schematic designator R35)
R35_Digit_3 "100" 0402 128,79 r0 top (schematic designator R35)
R36_Digit_1 "100" 0402 119,154.5 r180 top (schematic designator R36)
R36_Digit_2 "100" 0402 123.5,114 r270 top (schematic designator R36)
R36_Digit_3 "100" 0402 130,78 r0 top (schematic designator R36)
R37 "10k" chip0603#1 156,126.5 r180 top
R37_Digit_1 "68" chip0603#1 113,177 r90 bottom (schematic designator R37)
R37_Digit_2 "68" chip0603#1 107.5,111.5 r270 bottom (schematic designator R37)
R37_Digit_3 "68" chip0603#1 104.7,69 r90 bottom (schematic designator R37)
R38 "10k" ? 132.3,124.5 r0 bottom
R38_Digit_1 "5k6" chip0603#1 111.5,177 r90 bottom (schematic designator R38)
R38_Digit_2 "5k6" chip0603#1 109,111.5 r270 bottom (schematic designator R38)
R38_Digit_3 "5k6" chip0603#1 103.2,69 r90 bottom (schematic designator R38)
R39 "10K" chip0603#1 156,128 r180 top
R40 "10K" chip0603#1 156,125 r180 top
R40_Digit_1 "9k" chip0603#1 110,178.8 r180 bottom (schematic designator R40)
R40_Digit_2 "9k" chip0603#1 110.5,109.7 r0 bottom (schematic designator R40)
R40_Digit_3 "9k" chip0603#1 101.7,70.8 r180 bottom (schematic designator R40)
R41 "10K" chip0603#1 156,123.5 r180 top
R41_Digit_1 "1k" chip0603#1 108.2,177 r0 bottom (schematic designator R41)
R41_Digit_2 "1k" chip0603#1 112.3,111.5 r180 bottom (schematic designator R41)
R41_Digit_3 "1k" chip0603#1 99.9,69 r180 bottom (schematic designator R41)
R42 "10K" chip0603#1 156,122 r180 top
R43 "10k" chip0603#1 154.2,120.5 r0 top
R44 "200" chip0603#1 128.5,89.5 r0 top
R45 "51" chip0603#1 150,97.1 r270 top
R46 "51" chip0603#1 150,100.6 r270 top
R47 "22.1k" chip0603#1 139.45,92.5 r0 top
R48 "180" chip0603#1 169.7,109.5 r90 top
R49 "180" chip0603#1 148.2,104 r0 top
R50 "180" chip0603#1 146.2,89 r0 top
R51 "10k" ? 152.3,89 r180 top
R52 "10k" chip0603#1 171.2,111.3 r270 top
R53 "10k" chip0603#1 151.8,106.5 r180 top
RDFL1 "1k" chip0603#1 160.7,162.2 r90 top
RFL1 "1k" chip0603#1 157.8,164.3 r90 top
RFL2 "510" chip0603#1 151.1,163.9 r90 top
RFL3 "1k" chip0603#1 151.1,160 r90 top
RFL4 "110" chip0603#1 132.2,157.8 r90 top
RFL5 "1k" chip0603#1 153.4,157.7 r90 top
RLED1 "200" 1608[0603] 194,157.1 r90 top
RLED2 "300" 1608[0603] 199.9,157.1 r90 top
RLED3 "300" 1608[0603] 187.2,157.1 r90 top
Rref1 "90" chip0603#1 72.5,116.9 r270 top
Rref2 "120" chip0603#1 72.5,120.1 r270 top
Rsh1_Digit_1 "100" ? 68.7,171.8 r270 bottom (schematic designator Rsh1)
Rsh1_Digit_2 "100" ? 68.7,149 r270 bottom (schematic designator Rsh1)
Rsh1_Digit_3 "100" ? 68.7,92.3 r270 bottom (schematic designator Rsh1)
Rsh2_Digit_1 "100" ? 68.7,166.1 r270 bottom (schematic designator Rsh2)
Rsh2_Digit_2 "100" ? 68.7,143.3 r270 bottom (schematic designator Rsh2)
Rsh2_Digit_3 "100" ? 68.7,86.6 r270 bottom (schematic designator Rsh2)
Rsh3_Digit_1 "100" ? 68.7,160.6 r270 bottom (schematic designator Rsh3)
Rsh3_Digit_2 "100" ? 68.7,103.8 r270 bottom (schematic designator Rsh3)
Rsh3_Digit_3 "100" ? 68.7,81.1 r270 bottom (schematic designator Rsh3)
Rsh4_Digit_1 "100" ? 68.7,154.9 r270 bottom (schematic designator Rsh4)
Rsh4_Digit_2 "100" ? 68.7,98.1 r270 bottom (schematic designator Rsh4)
Rsh4_Digit_3 "100" ? 68.7,75.4 r270 bottom (schematic designator Rsh4)
Rsh5_Digit_1 "1k" ? 71,169.3 r0 top (schematic designator Rsh5)
Rsh5_Digit_2 "1k" ? 71,146.5 r0 top (schematic designator Rsh5)
Rsh5_Digit_3 "1k" ? 71,89.8 r0 top (schematic designator Rsh5)
Rsh6_Digit_1 "1k" ? 71,172.5 r0 top (schematic designator Rsh6)
Rsh6_Digit_2 "1k" ? 71,149.7 r0 top (schematic designator Rsh6)
Rsh6_Digit_3 "1k" ? 71,93 r0 top (schematic designator Rsh6)
Rsh7_Digit_1 "1k" ? 71,163.6 r0 top (schematic designator Rsh7)
Rsh7_Digit_2 "1k" ? 71,140.8 r0 top (schematic designator Rsh7)
Rsh7_Digit_3 "1k" ? 71,84.1 r0 top (schematic designator Rsh7)
Rsh8_Digit_1 "1k" ? 71,166.8 r0 top (schematic designator Rsh8)
Rsh8_Digit_2 "1k" ? 71,144 r0 top (schematic designator Rsh8)
Rsh8_Digit_3 "1k" ? 71,87.3 r0 top (schematic designator Rsh8)
Rsh9_Digit_1 "1k" ? 71,158.1 r0 top (schematic designator Rsh9)
Rsh9_Digit_2 "1k" ? 71,101.3 r0 top (schematic designator Rsh9)
Rsh9_Digit_3 "1k" ? 71,78.6 r0 top (schematic designator Rsh9)
Rsh10_Digit_1 "1k" ? 71,161.3 r0 top (schematic designator Rsh10)
Rsh10_Digit_2 "1k" ? 71,104.5 r0 top (schematic designator Rsh10)
Rsh10_Digit_3 "1k" ? 71,81.8 r0 top (schematic designator Rsh10)
Rsh11_Digit_1 "1k" ? 71,152.4 r0 top (schematic designator Rsh11)
Rsh11_Digit_2 "1k" ? 71,95.6 r0 top (schematic designator Rsh11)
Rsh11_Digit_3 "1k" ? 71,72.9 r0 top (schematic designator Rsh11)
Rsh12_Digit_1 "1k" ? 71,155.6 r0 top (schematic designator Rsh12)
Rsh12_Digit_2 "1k" ? 71,98.8 r0 top (schematic designator Rsh12)
Rsh12_Digit_3 "1k" ? 71,76.1 r0 top (schematic designator Rsh12)
Rsh13_Digit_1 "1k" ? 74.5,169.5 r0 top (schematic designator Rsh13)
Rsh13_Digit_2 "1k" ? 74.5,146.7 r0 top (schematic designator Rsh13)
Rsh13_Digit_3 "1k" ? 74.8,90 r0 top (schematic designator Rsh13)
Rsh14_Digit_1 "1k" ? 74.8,163.8 r0 top (schematic designator Rsh14)
Rsh14_Digit_2 "1k" ? 74.8,141 r0 top (schematic designator Rsh14)
Rsh14_Digit_3 "1k" ? 74.8,84.3 r0 top (schematic designator Rsh14)
Rsh15_Digit_1 "1k" ? 74.8,158.3 r0 top (schematic designator Rsh15)
Rsh15_Digit_2 "1k" ? 74.8,101.5 r0 top (schematic designator Rsh15)
Rsh15_Digit_3 "1k" ? 74.8,78.8 r0 top (schematic designator Rsh15)
Rsh16_Digit_1 "1k" ? 74.8,152.6 r0 top (schematic designator Rsh16)
Rsh16_Digit_2 "1k" ? 74.8,95.8 r0 top (schematic designator Rsh16)
Rsh16_Digit_3 "1k" ? 74.8,73.1 r0 top (schematic designator Rsh16)
Rsh17_Digit_1 "20" ? 77.8,172.1 r0 bottom (schematic designator Rsh17)
Rsh17_Digit_2 "20" ? 77.8,149.3 r0 bottom (schematic designator Rsh17)
Rsh17_Digit_3 "20" ? 77.8,92.6 r0 bottom (schematic designator Rsh17)
Rsh18_Digit_1 "20" ? 77.8,166.4 r0 bottom (schematic designator Rsh18)
Rsh18_Digit_2 "20" ? 77.8,143.6 r0 bottom (schematic designator Rsh18)
Rsh18_Digit_3 "20" ? 77.8,86.9 r0 bottom (schematic designator Rsh18)
Rsh19_Digit_1 "20" ? 77.8,160.9 r0 bottom (schematic designator Rsh19)
Rsh19_Digit_2 "20" ? 77.8,104.1 r0 bottom (schematic designator Rsh19)
Rsh19_Digit_3 "20" ? 77.8,81.4 r0 bottom (schematic designator Rsh19)
Rsh20_Digit_1 "20" ? 77.8,155.2 r0 bottom (schematic designator Rsh20)
Rsh20_Digit_2 "20" ? 77.8,98.4 r0 bottom (schematic designator Rsh20)
Rsh20_Digit_3 "20" ? 77.8,75.7 r0 bottom (schematic designator Rsh20)
Rsh21_Digit_1 "1k" ? 74.5,172.3 r0 top (schematic designator Rsh21)
Rsh21_Digit_2 "1k" ? 74.5,149.5 r0 top (schematic designator Rsh21)
Rsh21_Digit_3 "1k" ? 74.5,92.8 r0 top (schematic designator Rsh21)
Rsh22_Digit_1 "1k" ? 74.2,166.5 r0 top (schematic designator Rsh22)
Rsh22_Digit_2 "1k" ? 74.2,143.7 r0 top (schematic designator Rsh22)
Rsh22_Digit_3 "1k" ? 74.2,87 r0 top (schematic designator Rsh22)
Rsh23_Digit_1 "1k" ? 74.2,161 r0 top (schematic designator Rsh23)
Rsh23_Digit_2 "1k" ? 74.2,104.2 r0 top (schematic designator Rsh23)
Rsh23_Digit_3 "1k" ? 74.2,81.5 r0 top (schematic designator Rsh23)
Rsh24_Digit_1 "1k" ? 74.2,155.3 r0 top (schematic designator Rsh24)
Rsh24_Digit_2 "1k" ? 74.2,98.5 r0 top (schematic designator Rsh24)
Rsh24_Digit_3 "1k" ? 74.2,75.8 r0 top (schematic designator Rsh24)
Rsh25_Digit_1 "240" ? 77.2,170.9 r180 top (schematic designator Rsh25)
Rsh25_Digit_2 "240" ? 77.2,148.1 r180 top (schematic designator Rsh25)
Rsh25_Digit_3 "240" ? 77.2,91.4 r180 top (schematic designator Rsh25)
Rsh26_Digit_1 "240" ? 77.2,165.2 r180 top (schematic designator Rsh26)
Rsh26_Digit_2 "240" ? 77.2,142.4 r180 top (schematic designator Rsh26)
Rsh26_Digit_3 "240" ? 77.2,85.7 r180 top (schematic designator Rsh26)
Rsh27_Digit_1 "240" ? 77.2,159.7 r180 top (schematic designator Rsh27)
Rsh27_Digit_2 "240" ? 77.2,102.9 r180 top (schematic designator Rsh27)
Rsh27_Digit_3 "240" ? 77.2,80.2 r180 top (schematic designator Rsh27)
Rsh28_Digit_1 "240" ? 77.2,154 r180 top (schematic designator Rsh28)
Rsh28_Digit_2 "240" ? 77.2,97.2 r180 top (schematic designator Rsh28)
Rsh28_Digit_3 "240" ? 77.2,74.5 r180 top (schematic designator Rsh28)
Rsh29_Digit_1 "240" ? 78.4,170.9 r0 top (schematic designator Rsh29)
Rsh29_Digit_2 "240" ? 78.4,148.1 r0 top (schematic designator Rsh29)
Rsh29_Digit_3 "240" ? 78.4,91.4 r0 top (schematic designator Rsh29)
Rsh30_Digit_1 "240" ? 78.4,165.2 r0 top (schematic designator Rsh30)
Rsh30_Digit_2 "240" ? 78.4,142.4 r0 top (schematic designator Rsh30)
Rsh30_Digit_3 "240" ? 78.4,85.7 r0 top (schematic designator Rsh30)
Rsh31_Digit_1 "240" ? 78.4,159.7 r0 top (schematic designator Rsh31)
Rsh31_Digit_2 "240" ? 78.4,102.9 r0 top (schematic designator Rsh31)
Rsh31_Digit_3 "240" ? 78.4,80.2 r0 top (schematic designator Rsh31)
Rsh32_Digit_1 "240" ? 78.4,154 r0 top (schematic designator Rsh32)
Rsh32_Digit_2 "240" ? 78.4,97.2 r0 top (schematic designator Rsh32)
Rsh32_Digit_3 "240" ? 78.4,74.5 r0 top (schematic designator Rsh32)
Rsh33_Digit_1 "20" ? 84.2,173.4 r180 bottom (schematic designator Rsh33)
Rsh33_Digit_2 "20" ? 84.2,150.6 r180 bottom (schematic designator Rsh33)
Rsh33_Digit_3 "20" ? 84.2,93.9 r180 bottom (schematic designator Rsh33)
Rsh34_Digit_1 "20" ? 84.2,167.7 r180 bottom (schematic designator Rsh34)
Rsh34_Digit_2 "20" ? 84.2,144.9 r180 bottom (schematic designator Rsh34)
Rsh34_Digit_3 "20" ? 84.2,88.2 r180 bottom (schematic designator Rsh34)
Rsh35_Digit_1 "20" ? 84.2,162.2 r180 bottom (schematic designator Rsh35)
Rsh35_Digit_2 "20" ? 84.2,105.4 r180 bottom (schematic designator Rsh35)
Rsh35_Digit_3 "20" ? 84.2,82.7 r180 bottom (schematic designator Rsh35)
Rsh36_Digit_1 "20" ? 84.2,156.5 r180 bottom (schematic designator Rsh36)
Rsh36_Digit_2 "20" ? 84.2,99.7 r180 bottom (schematic designator Rsh36)
Rsh36_Digit_3 "20" ? 84.2,77 r180 bottom (schematic designator Rsh36)
Rsh37_Digit_1 "91" ? 83,171.2 r90 top (schematic designator Rsh37)
Rsh37_Digit_2 "91" ? 83,148.4 r90 top (schematic designator Rsh37)
Rsh37_Digit_3 "91" ? 83,91.7 r90 top (schematic designator Rsh37)
Rsh38_Digit_1 "1k" ? 81.2,169.9 r0 bottom (schematic designator Rsh38)
Rsh38_Digit_2 "1k" ? 81.2,147.1 r0 bottom (schematic designator Rsh38)
Rsh38_Digit_3 "1k" ? 81.2,90.4 r0 bottom (schematic designator Rsh38)
Rsh39_Digit_1 "91" ? 83,165.5 r90 top (schematic designator Rsh39)
Rsh39_Digit_2 "91" ? 83,142.7 r90 top (schematic designator Rsh39)
Rsh39_Digit_3 "91" ? 83,86 r90 top (schematic designator Rsh39)
Rsh40_Digit_1 "1k" ? 81.2,164.2 r0 bottom (schematic designator Rsh40)
Rsh40_Digit_2 "1k" ? 81.2,141.4 r0 bottom (schematic designator Rsh40)
Rsh40_Digit_3 "1k" ? 81.2,84.7 r0 bottom (schematic designator Rsh40)
Rsh41_Digit_1 "91" ? 83,160 r90 top (schematic designator Rsh41)
Rsh41_Digit_2 "91" ? 83,103.2 r90 top (schematic designator Rsh41)
Rsh41_Digit_3 "91" ? 83,80.5 r90 top (schematic designator Rsh41)
Rsh42_Digit_1 "1k" ? 81.2,158.7 r0 bottom (schematic designator Rsh42)
Rsh42_Digit_2 "1k" ? 81.2,101.9 r0 bottom (schematic designator Rsh42)
Rsh42_Digit_3 "1k" ? 81.2,79.2 r0 bottom (schematic designator Rsh42)